# EAGLE board XBee-Explorer-GiantPanel-v21 (EAGLE 6.5.0), part 1 of 7
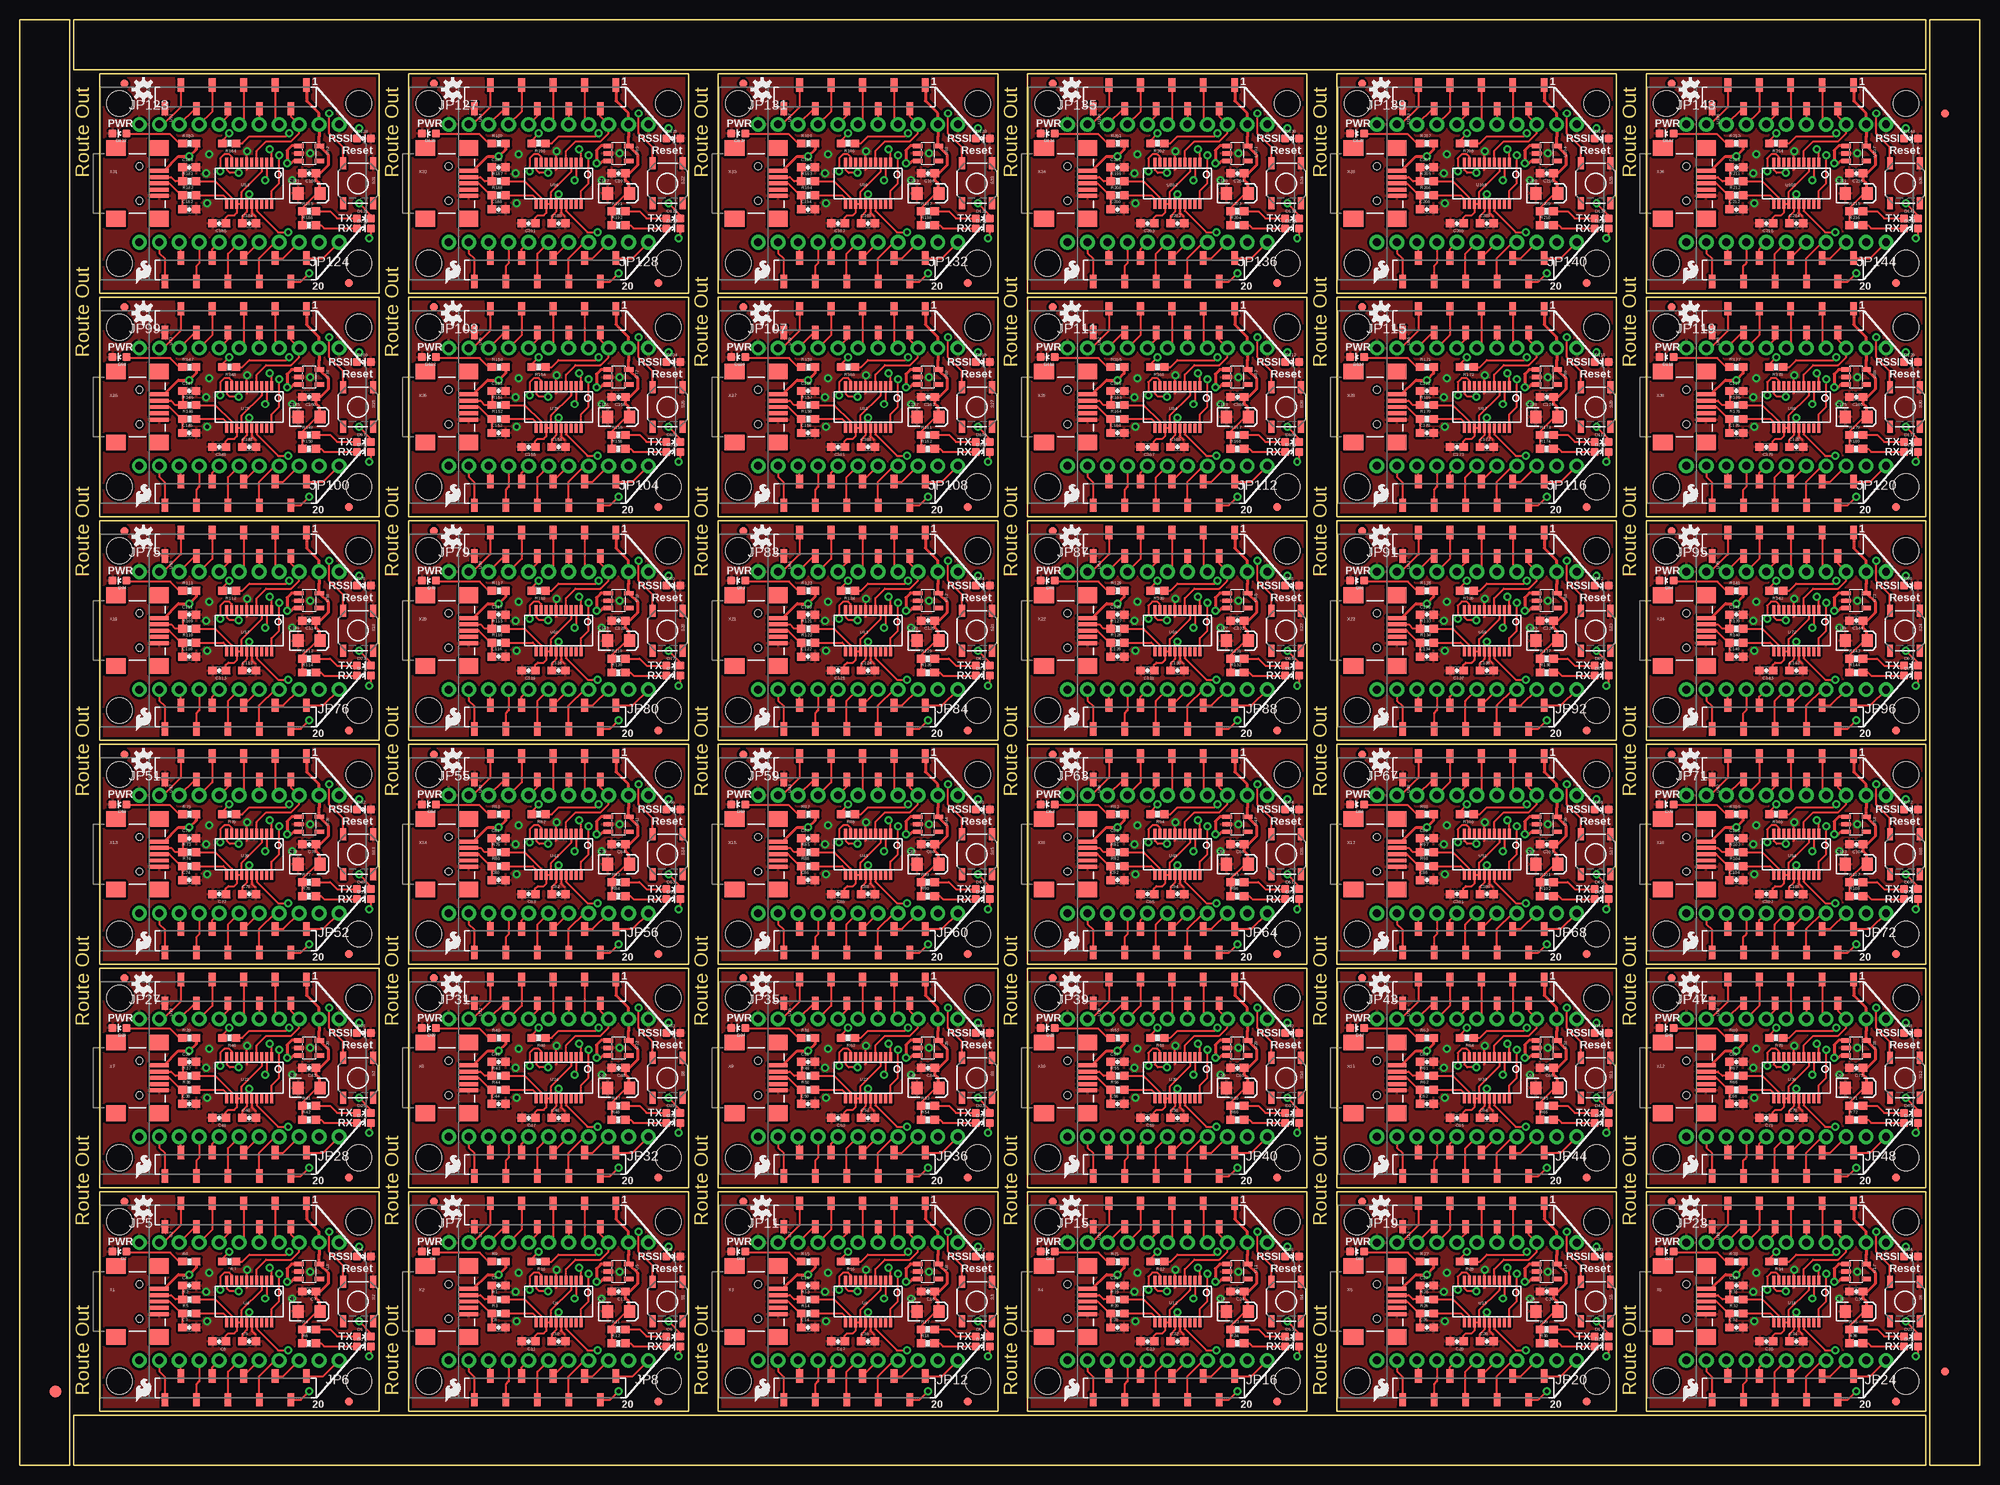
[diagram p0: board, top side]
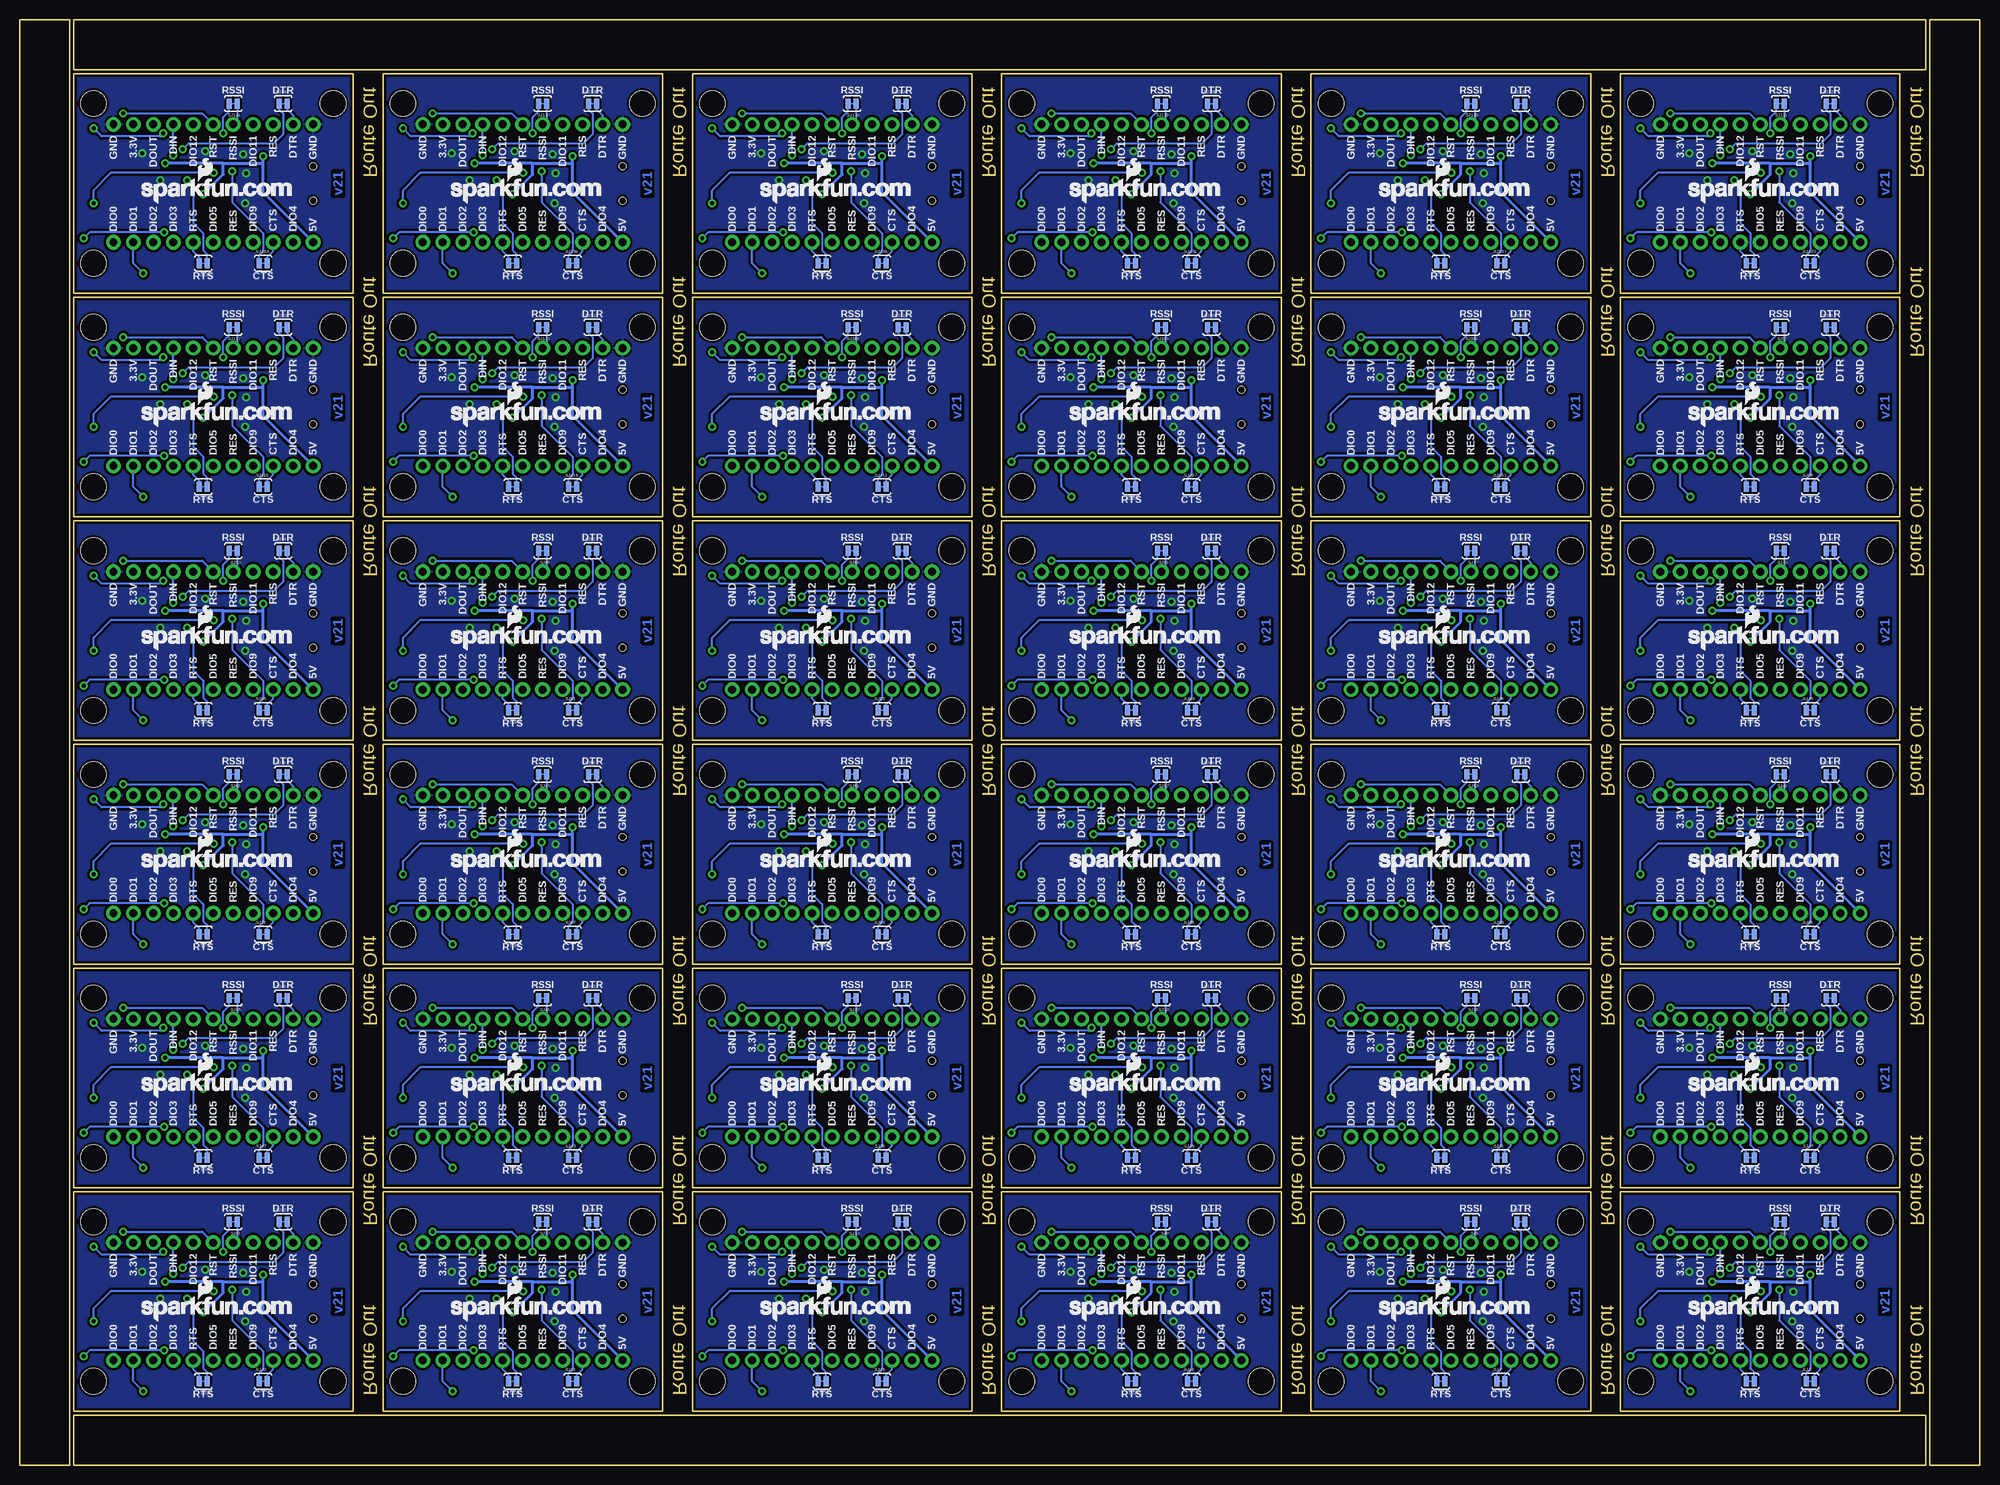
[diagram p1: board, bottom side, seen from below]

Size 249.43 x 183.9 mm. Coordinates in mm from the lower left corner, seen from the top.
Outline: 45.72,6.86 45.72,34.8 10.16,34.8 10.16,6.86 45.72,6.86
Outline: 85.09,6.86 85.09,34.8 49.53,34.8 49.53,6.86 85.09,6.86
Outline: 124.46,6.86 124.46,34.8 88.9,34.8 88.9,6.86 124.46,6.86
Outline: 163.83,6.86 163.83,34.8 128.27,34.8 128.27,6.86 163.83,6.86
Outline: 203.2,6.86 203.2,34.8 167.64,34.8 167.64,6.86 203.2,6.86
Outline: 242.57,6.86 242.57,34.8 207.01,34.8 207.01,6.86 242.57,6.86
Outline: 45.72,35.31 45.72,63.25 10.16,63.25 10.16,35.31 45.72,35.31
Outline: 85.09,35.31 85.09,63.25 49.53,63.25 49.53,35.31 85.09,35.31
Outline: 124.46,35.31 124.46,63.25 88.9,63.25 88.9,35.31 124.46,35.31
Outline: 163.83,35.31 163.83,63.25 128.27,63.25 128.27,35.31 163.83,35.31
Outline: 203.2,35.31 203.2,63.25 167.64,63.25 167.64,35.31 203.2,35.31
Outline: 242.57,35.31 242.57,63.25 207.01,63.25 207.01,35.31 242.57,35.31
Outline: 45.72,63.75 45.72,91.69 10.16,91.69 10.16,63.75 45.72,63.75
Outline: 85.09,63.75 85.09,91.69 49.53,91.69 49.53,63.75 85.09,63.75
Outline: 124.46,63.75 124.46,91.69 88.9,91.69 88.9,63.75 124.46,63.75
Outline: 163.83,63.75 163.83,91.69 128.27,91.69 128.27,63.75 163.83,63.75
Outline: 203.2,63.75 203.2,91.69 167.64,91.69 167.64,63.75 203.2,63.75
Outline: 242.57,63.75 242.57,91.69 207.01,91.69 207.01,63.75 242.57,63.75
Outline: 45.72,92.2 45.72,120.14 10.16,120.14 10.16,92.2 45.72,92.2
Outline: 85.09,92.2 85.09,120.14 49.53,120.14 49.53,92.2 85.09,92.2
Outline: 124.46,92.2 124.46,120.14 88.9,120.14 88.9,92.2 124.46,92.2
Outline: 163.83,92.2 163.83,120.14 128.27,120.14 128.27,92.2 163.83,92.2
Outline: 203.2,92.2 203.2,120.14 167.64,120.14 167.64,92.2 203.2,92.2
Outline: 242.57,92.2 242.57,120.14 207.01,120.14 207.01,92.2 242.57,92.2
Outline: 45.72,120.65 45.72,148.59 10.16,148.59 10.16,120.65 45.72,120.65
Outline: 85.09,120.65 85.09,148.59 49.53,148.59 49.53,120.65 85.09,120.65
Outline: 124.46,120.65 124.46,148.59 88.9,148.59 88.9,120.65 124.46,120.65
Outline: 163.83,120.65 163.83,148.59 128.27,148.59 128.27,120.65 163.83,120.65
Outline: 203.2,120.65 203.2,148.59 167.64,148.59 167.64,120.65 203.2,120.65
Outline: 242.57,120.65 242.57,148.59 207.01,148.59 207.01,120.65 242.57,120.65
Outline: 45.72,149.1 45.72,177.04 10.16,177.04 10.16,149.1 45.72,149.1
Outline: 85.09,149.1 85.09,177.04 49.53,177.04 49.53,149.1 85.09,149.1
Outline: 124.46,149.1 124.46,177.04 88.9,177.04 88.9,149.1 124.46,149.1
Outline: 163.83,149.1 163.83,177.04 128.27,177.04 128.27,149.1 163.83,149.1
Outline: 203.2,149.1 203.2,177.04 167.64,177.04 167.64,149.1 203.2,149.1
Outline: 242.57,149.1 242.57,177.04 207.01,177.04 207.01,149.1 242.57,149.1
Outline: 6.35,0 6.35,183.9 0,183.9 0,0 6.35,0
Outline: 6.86,6.35 6.86,0 242.57,0 242.57,6.35 6.86,6.35
Outline: 243.08,0 249.43,0 249.43,183.9 243.08,183.9 243.08,0
Outline: 242.57,177.55 242.57,183.9 6.86,183.9 6.86,177.55 242.57,177.55
Copper layers (1*16): Top 0.035mm / dielectric 1.5mm / Bottom 0.035mm
Design rules "SparkFun-2-layer": minimum track width 7mil, minimum drill 15mil, track to track 8mil, track to pad 8mil, pad to pad 8mil, via to via 8mil, smd to smd 8mil, copper to edge 8mil, drill to drill 8mil, minimum pad ring 12mil, minimum via ring 10mil, stop-mask expansion 4mil, vias tented up to drill 20mil, thermal gap 10mil
Net classes: 0 default: width 0.203 mm; 1 vcc: width 0.305 mm; 2 gnd: width 0.254 mm

## Footprints (pad centres in the part's own frame; a part is rotated, then mirrored left to right if it is on the bottom)
EIA3216 = smd 1.4 x 1.6: A 1.4,0; C -1.4,0
0603-CAP = smd 1.1 x 1: 1 -0.85,0; 2 0.85,0
LED-0603 = smd 1 x 1: A 0,-0.877; C 0,0.877
FIDUCIAL-1.5X3 = smd 1.5 x 1.5: 1 0,0
FIDUCIAL-1X2 = smd 1 x 1: 1 0,0
1X11_NO_SILK = drill 1.016 pad 1.88: 1 0,0; 2 2.54,0; 3 5.08,0; 4 7.62,0; 5 10.16,0; 6 12.7,0; 7 15.24,0; 8 17.78,0; 9 20.32,0; 10 22.86,0; 11 25.4,0
0603-RES = smd 1.1 x 1: 1 -0.85,0; 2 0.85,0
TACTILE_SWITCH_SMD = smd 1.524 x 0.762: 1 -2.54,1.905; 2 2.54,1.905; 3 -2.54,-1.905; 4 2.54,-1.905
SJ_2S-TRACE = smd 0.635 x 1.27: 1 -0.508,0; 2 0.508,0
XBEE-SMD = smd 1.7 x 0.85: 1 -12.5,20; 2 -9.5,18; 3 -12.5,16; 4 -9.5,14; 5 -12.5,12; 6 -9.5,10; 7 -12.5,8; 8 -9.5,6; 9 -12.5,4; 10 -9.5,2; 11 12.5,2; 12 9.5,4; 13 12.5,6; 14 9.5,8; 15 12.5,10; 16 9.5,12; 17 12.5,14; 18 9.5,16; 19 12.5,18; 20 9.5,20
SOT23-5 = smd 0.55 x 1.2: 1 -0.95,-1.3; 2 0,-1.3; 3 0.95,-1.3; 4 0.95,1.3; 5 -0.95,1.3
SSOP20_L = smd 0.381 x 1.143: 1 -2.857,-2.68; 2 -2.223,-2.68; 3 -1.587,-2.68; 4 -0.953,-2.68; 5 -0.318,-2.68; 6 0.318,-2.68; 7 0.953,-2.68; 8 1.587,-2.68; 9 2.223,-2.68; 10 2.857,-2.68; 11 2.857,2.68; 12 2.223,2.68; 13 1.587,2.68; 14 0.953,2.68; 15 0.318,2.68; 16 -0.318,2.68; 17 -0.953,2.68; 18 -1.587,2.68; 19 -2.223,2.68; 20 -2.857,2.68
STAND-OFF = hole 3.302: 0,0
USB-MINIB = smd 2.5 x 0.5: D+ 2.5,0; D- 2.5,0.8; GND 2.5,-1.6; ID 2.5,-0.8; VBUS 2.5,1.6 | smd 2.5 x 2: GND@1 -3,-4.5; GND@2 -3,4.5; GND@3 2.5,4.5; GND@4 2.5,-4.5 | hole 0.9: 0,2.2; 0,-2.2

## Placement (x,y rotation side)
C1  10uF  [EIA3216]  36.83,19.56 0 top
C2  10uF  [EIA3216]  76.2,19.56 0 top
C3  47pF  [0603-CAP]  21.59,17.53 0 top
C4  47pF  [0603-CAP]  21.59,22.86 0 top
C5  0.1uF  [0603-CAP]  29.21,15.75 0 top
C6  0.1uF  [0603-CAP]  25.4,15.75 180 top
C7  0.1uF  [0603-CAP]  36.83,22.1 180 top
C8  47pF  [0603-CAP]  60.96,17.53 0 top
C9  47pF  [0603-CAP]  60.96,22.86 0 top
C10  0.1uF  [0603-CAP]  68.58,15.75 0 top
C11  0.1uF  [0603-CAP]  64.77,15.75 180 top
C12  0.1uF  [0603-CAP]  76.2,22.1 180 top
C13  10uF  [EIA3216]  115.57,19.56 0 top
C14  47pF  [0603-CAP]  100.33,17.53 0 top
C15  47pF  [0603-CAP]  100.33,22.86 0 top
C16  0.1uF  [0603-CAP]  107.95,15.75 0 top
C17  0.1uF  [0603-CAP]  104.14,15.75 180 top
C18  0.1uF  [0603-CAP]  115.57,22.1 180 top
C19  10uF  [EIA3216]  154.94,19.56 0 top
C20  47pF  [0603-CAP]  139.7,17.53 0 top
C21  47pF  [0603-CAP]  139.7,22.86 0 top
C22  0.1uF  [0603-CAP]  147.32,15.75 0 top
C23  0.1uF  [0603-CAP]  143.51,15.75 180 top
C24  0.1uF  [0603-CAP]  154.94,22.1 180 top
C25  10uF  [EIA3216]  194.31,19.56 0 top
C26  47pF  [0603-CAP]  179.07,17.53 0 top
C27  47pF  [0603-CAP]  179.07,22.86 0 top
C28  0.1uF  [0603-CAP]  186.69,15.75 0 top
C29  0.1uF  [0603-CAP]  182.88,15.75 180 top
C30  0.1uF  [0603-CAP]  194.31,22.1 180 top
C31  10uF  [EIA3216]  233.68,19.56 0 top
C32  47pF  [0603-CAP]  218.44,17.53 0 top
C33  47pF  [0603-CAP]  218.44,22.86 0 top
C34  0.1uF  [0603-CAP]  226.06,15.75 0 top
C35  0.1uF  [0603-CAP]  222.25,15.75 180 top
C36  0.1uF  [0603-CAP]  233.68,22.1 180 top
C37  10uF  [EIA3216]  36.83,48.01 0 top
C38  47pF  [0603-CAP]  21.59,45.97 0 top
C39  47pF  [0603-CAP]  21.59,51.31 0 top
C40  0.1uF  [0603-CAP]  29.21,44.2 0 top
C41  0.1uF  [0603-CAP]  25.4,44.2 180 top
C42  0.1uF  [0603-CAP]  36.83,50.55 180 top
C43  10uF  [EIA3216]  76.2,48.01 0 top
C44  47pF  [0603-CAP]  60.96,45.97 0 top
C45  47pF  [0603-CAP]  60.96,51.31 0 top
C46  0.1uF  [0603-CAP]  68.58,44.2 0 top
C47  0.1uF  [0603-CAP]  64.77,44.2 180 top
C48  0.1uF  [0603-CAP]  76.2,50.55 180 top
C49  10uF  [EIA3216]  115.57,48.01 0 top
C50  47pF  [0603-CAP]  100.33,45.97 0 top
C51  47pF  [0603-CAP]  100.33,51.31 0 top
C52  0.1uF  [0603-CAP]  107.95,44.2 0 top
C53  0.1uF  [0603-CAP]  104.14,44.2 180 top
C54  0.1uF  [0603-CAP]  115.57,50.55 180 top
C55  10uF  [EIA3216]  154.94,48.01 0 top
C56  47pF  [0603-CAP]  139.7,45.97 0 top
C57  47pF  [0603-CAP]  139.7,51.31 0 top
C58  0.1uF  [0603-CAP]  147.32,44.2 0 top
C59  0.1uF  [0603-CAP]  143.51,44.2 180 top
C60  0.1uF  [0603-CAP]  154.94,50.55 180 top
C61  10uF  [EIA3216]  194.31,48.01 0 top
C62  47pF  [0603-CAP]  179.07,45.97 0 top
C63  47pF  [0603-CAP]  179.07,51.31 0 top
C64  0.1uF  [0603-CAP]  186.69,44.2 0 top
C65  0.1uF  [0603-CAP]  182.88,44.2 180 top
C66  0.1uF  [0603-CAP]  194.31,50.55 180 top
C67  10uF  [EIA3216]  233.68,48.01 0 top
C68  47pF  [0603-CAP]  218.44,45.97 0 top
C69  47pF  [0603-CAP]  218.44,51.31 0 top
C70  0.1uF  [0603-CAP]  226.06,44.2 0 top
C71  0.1uF  [0603-CAP]  222.25,44.2 180 top
C72  0.1uF  [0603-CAP]  233.68,50.55 180 top
C73  10uF  [EIA3216]  36.83,76.45 0 top
C74  47pF  [0603-CAP]  21.59,74.42 0 top
C75  47pF  [0603-CAP]  21.59,79.76 0 top
C76  0.1uF  [0603-CAP]  29.21,72.64 0 top
C77  0.1uF  [0603-CAP]  25.4,72.64 180 top
C78  0.1uF  [0603-CAP]  36.83,78.99 180 top
C79  10uF  [EIA3216]  76.2,76.45 0 top
C80  47pF  [0603-CAP]  60.96,74.42 0 top
C81  47pF  [0603-CAP]  60.96,79.76 0 top
C82  0.1uF  [0603-CAP]  68.58,72.64 0 top
C83  0.1uF  [0603-CAP]  64.77,72.64 180 top
C84  0.1uF  [0603-CAP]  76.2,78.99 180 top
C85  10uF  [EIA3216]  115.57,76.45 0 top
C86  47pF  [0603-CAP]  100.33,74.42 0 top
C87  47pF  [0603-CAP]  100.33,79.76 0 top
C88  0.1uF  [0603-CAP]  107.95,72.64 0 top
C89  0.1uF  [0603-CAP]  104.14,72.64 180 top
C90  0.1uF  [0603-CAP]  115.57,78.99 180 top
C91  10uF  [EIA3216]  154.94,76.45 0 top
C92  47pF  [0603-CAP]  139.7,74.42 0 top
C93  47pF  [0603-CAP]  139.7,79.76 0 top
C94  0.1uF  [0603-CAP]  147.32,72.64 0 top
C95  0.1uF  [0603-CAP]  143.51,72.64 180 top
C96  0.1uF  [0603-CAP]  154.94,78.99 180 top
C97  10uF  [EIA3216]  194.31,76.45 0 top
C98  47pF  [0603-CAP]  179.07,74.42 0 top
C99  47pF  [0603-CAP]  179.07,79.76 0 top
C100  0.1uF  [0603-CAP]  186.69,72.64 0 top
C101  0.1uF  [0603-CAP]  182.88,72.64 180 top
C102  0.1uF  [0603-CAP]  194.31,78.99 180 top
C103  10uF  [EIA3216]  233.68,76.45 0 top
C104  47pF  [0603-CAP]  218.44,74.42 0 top
C105  47pF  [0603-CAP]  218.44,79.76 0 top
C106  0.1uF  [0603-CAP]  226.06,72.64 0 top
C107  0.1uF  [0603-CAP]  222.25,72.64 180 top
C108  0.1uF  [0603-CAP]  233.68,78.99 180 top
C109  10uF  [EIA3216]  36.83,104.9 0 top
C110  47pF  [0603-CAP]  21.59,102.87 0 top
C111  47pF  [0603-CAP]  21.59,108.2 0 top
C112  0.1uF  [0603-CAP]  29.21,101.09 0 top
C113  0.1uF  [0603-CAP]  25.4,101.09 180 top
C114  0.1uF  [0603-CAP]  36.83,107.44 180 top
C115  10uF  [EIA3216]  76.2,104.9 0 top
C116  47pF  [0603-CAP]  60.96,102.87 0 top
C117  47pF  [0603-CAP]  60.96,108.2 0 top
C118  0.1uF  [0603-CAP]  68.58,101.09 0 top
C119  0.1uF  [0603-CAP]  64.77,101.09 180 top
C120  0.1uF  [0603-CAP]  76.2,107.44 180 top
C121  10uF  [EIA3216]  115.57,104.9 0 top
C122  47pF  [0603-CAP]  100.33,102.87 0 top
C123  47pF  [0603-CAP]  100.33,108.2 0 top
C124  0.1uF  [0603-CAP]  107.95,101.09 0 top
C125  0.1uF  [0603-CAP]  104.14,101.09 180 top
C126  0.1uF  [0603-CAP]  115.57,107.44 180 top
C127  10uF  [EIA3216]  154.94,104.9 0 top
C128  47pF  [0603-CAP]  139.7,102.87 0 top
C129  47pF  [0603-CAP]  139.7,108.2 0 top
C130  0.1uF  [0603-CAP]  147.32,101.09 0 top
C131  0.1uF  [0603-CAP]  143.51,101.09 180 top
C132  0.1uF  [0603-CAP]  154.94,107.44 180 top
C133  10uF  [EIA3216]  194.31,104.9 0 top
C134  47pF  [0603-CAP]  179.07,102.87 0 top
C135  47pF  [0603-CAP]  179.07,108.2 0 top
C136  0.1uF  [0603-CAP]  186.69,101.09 0 top
C137  0.1uF  [0603-CAP]  182.88,101.09 180 top
C138  0.1uF  [0603-CAP]  194.31,107.44 180 top
C139  10uF  [EIA3216]  233.68,104.9 0 top
C140  47pF  [0603-CAP]  218.44,102.87 0 top
C141  47pF  [0603-CAP]  218.44,108.2 0 top
C142  0.1uF  [0603-CAP]  226.06,101.09 0 top
C143  0.1uF  [0603-CAP]  222.25,101.09 180 top
C144  0.1uF  [0603-CAP]  233.68,107.44 180 top
C145  10uF  [EIA3216]  36.83,133.35 0 top
C146  47pF  [0603-CAP]  21.59,131.32 0 top
C147  47pF  [0603-CAP]  21.59,136.65 0 top
C148  0.1uF  [0603-CAP]  29.21,129.54 0 top
C149  0.1uF  [0603-CAP]  25.4,129.54 180 top
C150  0.1uF  [0603-CAP]  36.83,135.89 180 top
C151  10uF  [EIA3216]  76.2,133.35 0 top
C152  47pF  [0603-CAP]  60.96,131.32 0 top
C153  47pF  [0603-CAP]  60.96,136.65 0 top
C154  0.1uF  [0603-CAP]  68.58,129.54 0 top
C155  0.1uF  [0603-CAP]  64.77,129.54 180 top
C156  0.1uF  [0603-CAP]  76.2,135.89 180 top
C157  10uF  [EIA3216]  115.57,133.35 0 top
C158  47pF  [0603-CAP]  100.33,131.32 0 top
C159  47pF  [0603-CAP]  100.33,136.65 0 top
C160  0.1uF  [0603-CAP]  107.95,129.54 0 top
C161  0.1uF  [0603-CAP]  104.14,129.54 180 top
C162  0.1uF  [0603-CAP]  115.57,135.89 180 top
C163  10uF  [EIA3216]  154.94,133.35 0 top
C164  47pF  [0603-CAP]  139.7,131.32 0 top
C165  47pF  [0603-CAP]  139.7,136.65 0 top
C166  0.1uF  [0603-CAP]  147.32,129.54 0 top
C167  0.1uF  [0603-CAP]  143.51,129.54 180 top
C168  0.1uF  [0603-CAP]  154.94,135.89 180 top
C169  10uF  [EIA3216]  194.31,133.35 0 top
C170  47pF  [0603-CAP]  179.07,131.32 0 top
C171  47pF  [0603-CAP]  179.07,136.65 0 top
C172  0.1uF  [0603-CAP]  186.69,129.54 0 top
C173  0.1uF  [0603-CAP]  182.88,129.54 180 top
C174  0.1uF  [0603-CAP]  194.31,135.89 180 top
C175  10uF  [EIA3216]  233.68,133.35 0 top
C176  47pF  [0603-CAP]  218.44,131.32 0 top
C177  47pF  [0603-CAP]  218.44,136.65 0 top
C178  0.1uF  [0603-CAP]  226.06,129.54 0 top
C179  0.1uF  [0603-CAP]  222.25,129.54 180 top
C180  0.1uF  [0603-CAP]  233.68,135.89 180 top
C181  10uF  [EIA3216]  36.83,161.8 0 top
C182  47pF  [0603-CAP]  21.59,159.77 0 top
C183  47pF  [0603-CAP]  21.59,165.1 0 top
C184  0.1uF  [0603-CAP]  29.21,157.99 0 top
C185  0.1uF  [0603-CAP]  25.4,157.99 180 top
C186  0.1uF  [0603-CAP]  36.83,164.34 180 top
C187  10uF  [EIA3216]  76.2,161.8 0 top
C188  47pF  [0603-CAP]  60.96,159.77 0 top
C189  47pF  [0603-CAP]  60.96,165.1 0 top
C190  0.1uF  [0603-CAP]  68.58,157.99 0 top
C191  0.1uF  [0603-CAP]  64.77,157.99 180 top
C192  0.1uF  [0603-CAP]  76.2,164.34 180 top
C193  10uF  [EIA3216]  115.57,161.8 0 top
C194  47pF  [0603-CAP]  100.33,159.77 0 top
C195  47pF  [0603-CAP]  100.33,165.1 0 top
C196  0.1uF  [0603-CAP]  107.95,157.99 0 top
C197  0.1uF  [0603-CAP]  104.14,157.99 180 top
C198  0.1uF  [0603-CAP]  115.57,164.34 180 top
C199  10uF  [EIA3216]  154.94,161.8 0 top
C200  47pF  [0603-CAP]  139.7,159.77 0 top
C201  47pF  [0603-CAP]  139.7,165.1 0 top
C202  0.1uF  [0603-CAP]  147.32,157.99 0 top
C203  0.1uF  [0603-CAP]  143.51,157.99 180 top
C204  0.1uF  [0603-CAP]  154.94,164.34 180 top
C205  10uF  [EIA3216]  194.31,161.8 0 top
C206  47pF  [0603-CAP]  179.07,159.77 0 top
C207  47pF  [0603-CAP]  179.07,165.1 0 top
C208  0.1uF  [0603-CAP]  186.69,157.99 0 top
C209  0.1uF  [0603-CAP]  182.88,157.99 180 top
C210  0.1uF  [0603-CAP]  194.31,164.34 180 top
C211  10uF  [EIA3216]  233.68,161.8 0 top
C212  47pF  [0603-CAP]  218.44,159.77 0 top
C213  47pF  [0603-CAP]  218.44,165.1 0 top
C214  0.1uF  [0603-CAP]  226.06,157.99 0 top
C215  0.1uF  [0603-CAP]  222.25,157.99 180 top
C216  0.1uF  [0603-CAP]  233.68,164.34 180 top
D1  RED  [LED-0603]  43.81,16.38 270 top
D2  RED  [LED-0603]  12.7,27.18 90 top
D3  GREEN  [LED-0603]  43.81,15.11 270 top
D4  GREEN  [LED-0603]  43.81,26.54 270 top
D5  RED  [LED-0603]  83.19,16.38 270 top
D6  RED  [LED-0603]  52.07,27.18 90 top
D7  GREEN  [LED-0603]  83.19,15.11 270 top
D8  GREEN  [LED-0603]  83.19,26.54 270 top
D9  RED  [LED-0603]  122.56,16.38 270 top
D10  RED  [LED-0603]  91.44,27.18 90 top
D11  GREEN  [LED-0603]  122.56,15.11 270 top
D12  GREEN  [LED-0603]  122.56,26.54 270 top
D13  RED  [LED-0603]  161.93,16.38 270 top
D14  RED  [LED-0603]  130.81,27.18 90 top
D15  GREEN  [LED-0603]  161.93,15.11 270 top
D16  GREEN  [LED-0603]  161.93,26.54 270 top
D17  RED  [LED-0603]  201.29,16.38 270 top
D18  RED  [LED-0603]  170.18,27.18 90 top
D19  GREEN  [LED-0603]  201.29,15.11 270 top
D20  GREEN  [LED-0603]  201.29,26.54 270 top
D21  RED  [LED-0603]  240.66,16.38 270 top
D22  RED  [LED-0603]  209.55,27.18 90 top
D23  GREEN  [LED-0603]  240.66,15.11 270 top
D24  GREEN  [LED-0603]  240.66,26.54 270 top
D25  RED  [LED-0603]  43.81,44.83 270 top
D26  RED  [LED-0603]  12.7,55.63 90 top
D27  GREEN  [LED-0603]  43.81,43.56 270 top
D28  GREEN  [LED-0603]  43.81,54.99 270 top
D29  RED  [LED-0603]  83.19,44.83 270 top
D30  RED  [LED-0603]  52.07,55.63 90 top
D31  GREEN  [LED-0603]  83.19,43.56 270 top
D32  GREEN  [LED-0603]  83.19,54.99 270 top
D33  RED  [LED-0603]  122.56,44.83 270 top
D34  RED  [LED-0603]  91.44,55.63 90 top
D35  GREEN  [LED-0603]  122.56,43.56 270 top
D36  GREEN  [LED-0603]  122.56,54.99 270 top
D37  RED  [LED-0603]  161.93,44.83 270 top
D38  RED  [LED-0603]  130.81,55.63 90 top
D39  GREEN  [LED-0603]  161.93,43.56 270 top
D40  GREEN  [LED-0603]  161.93,54.99 270 top
D41  RED  [LED-0603]  201.29,44.83 270 top
D42  RED  [LED-0603]  170.18,55.63 90 top
D43  GREEN  [LED-0603]  201.29,43.56 270 top
D44  GREEN  [LED-0603]  201.29,54.99 270 top
D45  RED  [LED-0603]  240.66,44.83 270 top
D46  RED  [LED-0603]  209.55,55.63 90 top
D47  GREEN  [LED-0603]  240.66,43.56 270 top
D48  GREEN  [LED-0603]  240.66,54.99 270 top
D49  RED  [LED-0603]  43.81,73.28 270 top
D50  RED  [LED-0603]  12.7,84.07 90 top
D51  GREEN  [LED-0603]  43.81,72.01 270 top
D52  GREEN  [LED-0603]  43.81,83.44 270 top
D53  RED  [LED-0603]  83.19,73.28 270 top
D54  RED  [LED-0603]  52.07,84.07 90 top
D55  GREEN  [LED-0603]  83.19,72.01 270 top
D56  GREEN  [LED-0603]  83.19,83.44 270 top
D57  RED  [LED-0603]  122.56,73.28 270 top
D58  RED  [LED-0603]  91.44,84.07 90 top
D59  GREEN  [LED-0603]  122.56,72.01 270 top
D60  GREEN  [LED-0603]  122.56,83.44 270 top
D61  RED  [LED-0603]  161.93,73.28 270 top
D62  RED  [LED-0603]  130.81,84.07 90 top
D63  GREEN  [LED-0603]  161.93,72.01 270 top
D64  GREEN  [LED-0603]  161.93,83.44 270 top
D65  RED  [LED-0603]  201.29,73.28 270 top
D66  RED  [LED-0603]  170.18,84.07 90 top
D67  GREEN  [LED-0603]  201.29,72.01 270 top
D68  GREEN  [LED-0603]  201.29,83.44 270 top
D69  RED  [LED-0603]  240.66,73.28 270 top
D70  RED  [LED-0603]  209.55,84.07 90 top
D71  GREEN  [LED-0603]  240.66,72.01 270 top
D72  GREEN  [LED-0603]  240.66,83.44 270 top
D73  RED  [LED-0603]  43.81,101.73 270 top
D74  RED  [LED-0603]  12.7,112.52 90 top
D75  GREEN  [LED-0603]  43.81,100.46 270 top
D76  GREEN  [LED-0603]  43.81,111.89 270 top
D77  RED  [LED-0603]  83.19,101.73 270 top
D78  RED  [LED-0603]  52.07,112.52 90 top
D79  GREEN  [LED-0603]  83.19,100.46 270 top
D80  GREEN  [LED-0603]  83.19,111.89 270 top
D81  RED  [LED-0603]  122.56,101.73 270 top
D82  RED  [LED-0603]  91.44,112.52 90 top
D83  GREEN  [LED-0603]  122.56,100.46 270 top
D84  GREEN  [LED-0603]  122.56,111.89 270 top
D85  RED  [LED-0603]  161.93,101.73 270 top
D86  RED  [LED-0603]  130.81,112.52 90 top
D87  GREEN  [LED-0603]  161.93,100.46 270 top
D88  GREEN  [LED-0603]  161.93,111.89 270 top
D89  RED  [LED-0603]  201.29,101.73 270 top
D90  RED  [LED-0603]  170.18,112.52 90 top
D91  GREEN  [LED-0603]  201.29,100.46 270 top
D92  GREEN  [LED-0603]  201.29,111.89 270 top
D93  RED  [LED-0603]  240.66,101.73 270 top
D94  RED  [LED-0603]  209.55,112.52 90 top
D95  GREEN  [LED-0603]  240.66,100.46 270 top
D96  GREEN  [LED-0603]  240.66,111.89 270 top
D97  RED  [LED-0603]  43.81,130.18 270 top
D98  RED  [LED-0603]  12.7,140.97 90 top
D99  GREEN  [LED-0603]  43.81,128.91 270 top
D100  GREEN  [LED-0603]  43.81,140.34 270 top
D101  RED  [LED-0603]  83.19,130.18 270 top
D102  RED  [LED-0603]  52.07,140.97 90 top
D103  GREEN  [LED-0603]  83.19,128.91 270 top
D104  GREEN  [LED-0603]  83.19,140.34 270 top
D105  RED  [LED-0603]  122.56,130.18 270 top
D106  RED  [LED-0603]  91.44,140.97 90 top
D107  GREEN  [LED-0603]  122.56,128.91 270 top
D108  GREEN  [LED-0603]  122.56,140.34 270 top
D109  RED  [LED-0603]  161.93,130.18 270 top
D110  RED  [LED-0603]  130.81,140.97 90 top
D111  GREEN  [LED-0603]  161.93,128.91 270 top
D112  GREEN  [LED-0603]  161.93,140.34 270 top
D113  RED  [LED-0603]  201.29,130.18 270 top
D114  RED  [LED-0603]  170.18,140.97 90 top
D115  GREEN  [LED-0603]  201.29,128.91 270 top
D116  GREEN  [LED-0603]  201.29,140.34 270 top
D117  RED  [LED-0603]  240.66,130.18 270 top
D118  RED  [LED-0603]  209.55,140.97 90 top
D119  GREEN  [LED-0603]  240.66,128.91 270 top
D120  GREEN  [LED-0603]  240.66,140.34 270 top
D121  RED  [LED-0603]  43.81,158.62 270 top
D122  RED  [LED-0603]  12.7,169.42 90 top
D123  GREEN  [LED-0603]  43.81,157.35 270 top
D124  GREEN  [LED-0603]  43.81,168.78 270 top
D125  RED  [LED-0603]  83.19,158.62 270 top
D126  RED  [LED-0603]  52.07,169.42 90 top
D127  GREEN  [LED-0603]  83.19,157.35 270 top
D128  GREEN  [LED-0603]  83.19,168.78 270 top
D129  RED  [LED-0603]  122.56,158.62 270 top
D130  RED  [LED-0603]  91.44,169.42 90 top
D131  GREEN  [LED-0603]  122.56,157.35 270 top
D132  GREEN  [LED-0603]  122.56,168.78 270 top
D133  RED  [LED-0603]  161.93,158.62 270 top
D134  RED  [LED-0603]  130.81,169.42 90 top
D135  GREEN  [LED-0603]  161.93,157.35 270 top
D136  GREEN  [LED-0603]  161.93,168.78 270 top
D137  RED  [LED-0603]  201.29,158.62 270 top
D138  RED  [LED-0603]  170.18,169.42 90 top
D139  GREEN  [LED-0603]  201.29,157.35 270 top
D140  GREEN  [LED-0603]  201.29,168.78 270 top
D141  RED  [LED-0603]  240.66,158.62 270 top
D142  RED  [LED-0603]  209.55,169.42 90 top
D143  GREEN  [LED-0603]  240.66,157.35 270 top
D144  GREEN  [LED-0603]  240.66,168.78 270 top
E$1  [FIDUCIAL-1.5X3]  4.57,9.4 0 top
E$5  [FIDUCIAL-1X2]  244.98,11.94 0 top
E$7  [FIDUCIAL-1X2]  244.98,171.96 180 top
JP1  FIDUCIAL1X2  [FIDUCIAL-1X2]  41.91,8.13 0 top
JP2  FIDUCIAL1X2  [FIDUCIAL-1X2]  81.28,8.13 0 top
JP3  FIDUCIAL1X2  [FIDUCIAL-1X2]  52.7,33.53 0 top
JP4  FIDUCIAL1X2  [FIDUCIAL-1X2]  13.34,33.53 0 top
JP5  M111X11_NO_SILK  [1X11_NO_SILK]  15.24,28.32 0 top
JP6  M111X11_NO_SILK  [1X11_NO_SILK]  40.64,13.34 180 top
JP7  M111X11_NO_SILK  [1X11_NO_SILK]  54.61,28.32 0 top
JP8  M111X11_NO_SILK  [1X11_NO_SILK]  80.01,13.34 180 top
JP9  FIDUCIAL1X2  [FIDUCIAL-1X2]  120.65,8.13 0 top
JP10  FIDUCIAL1X2  [FIDUCIAL-1X2]  92.08,33.53 0 top
JP11  M111X11_NO_SILK  [1X11_NO_SILK]  93.98,28.32 0 top
JP12  M111X11_NO_SILK  [1X11_NO_SILK]  119.38,13.34 180 top
JP13  FIDUCIAL1X2  [FIDUCIAL-1X2]  160.02,8.13 0 top
JP14  FIDUCIAL1X2  [FIDUCIAL-1X2]  131.44,33.53 0 top
JP15  M111X11_NO_SILK  [1X11_NO_SILK]  133.35,28.32 0 top
JP16  M111X11_NO_SILK  [1X11_NO_SILK]  158.75,13.34 180 top
JP17  FIDUCIAL1X2  [FIDUCIAL-1X2]  199.39,8.13 0 top
JP18  FIDUCIAL1X2  [FIDUCIAL-1X2]  170.81,33.53 0 top
JP19  M111X11_NO_SILK  [1X11_NO_SILK]  172.72,28.32 0 top
JP20  M111X11_NO_SILK  [1X11_NO_SILK]  198.12,13.34 180 top
JP21  FIDUCIAL1X2  [FIDUCIAL-1X2]  238.76,8.13 0 top
JP22  FIDUCIAL1X2  [FIDUCIAL-1X2]  210.19,33.53 0 top
JP23  M111X11_NO_SILK  [1X11_NO_SILK]  212.09,28.32 0 top
JP24  M111X11_NO_SILK  [1X11_NO_SILK]  237.49,13.34 180 top
JP25  FIDUCIAL1X2  [FIDUCIAL-1X2]  41.91,36.58 0 top
JP26  FIDUCIAL1X2  [FIDUCIAL-1X2]  13.34,61.98 0 top
JP27  M111X11_NO_SILK  [1X11_NO_SILK]  15.24,56.77 0 top
JP28  M111X11_NO_SILK  [1X11_NO_SILK]  40.64,41.78 180 top
JP29  FIDUCIAL1X2  [FIDUCIAL-1X2]  81.28,36.58 0 top
JP30  FIDUCIAL1X2  [FIDUCIAL-1X2]  52.7,61.98 0 top
JP31  M111X11_NO_SILK  [1X11_NO_SILK]  54.61,56.77 0 top
JP32  M111X11_NO_SILK  [1X11_NO_SILK]  80.01,41.78 180 top
JP33  FIDUCIAL1X2  [FIDUCIAL-1X2]  120.65,36.58 0 top
JP34  FIDUCIAL1X2  [FIDUCIAL-1X2]  92.08,61.98 0 top
JP35  M111X11_NO_SILK  [1X11_NO_SILK]  93.98,56.77 0 top
JP36  M111X11_NO_SILK  [1X11_NO_SILK]  119.38,41.78 180 top
JP37  FIDUCIAL1X2  [FIDUCIAL-1X2]  160.02,36.58 0 top
JP38  FIDUCIAL1X2  [FIDUCIAL-1X2]  131.44,61.98 0 top
JP39  M111X11_NO_SILK  [1X11_NO_SILK]  133.35,56.77 0 top
JP40  M111X11_NO_SILK  [1X11_NO_SILK]  158.75,41.78 180 top
JP41  FIDUCIAL1X2  [FIDUCIAL-1X2]  199.39,36.58 0 top
JP42  FIDUCIAL1X2  [FIDUCIAL-1X2]  170.81,61.98 0 top
JP43  M111X11_NO_SILK  [1X11_NO_SILK]  172.72,56.77 0 top
JP44  M111X11_NO_SILK  [1X11_NO_SILK]  198.12,41.78 180 top
JP45  FIDUCIAL1X2  [FIDUCIAL-1X2]  238.76,36.58 0 top
JP46  FIDUCIAL1X2  [FIDUCIAL-1X2]  210.19,61.98 0 top
JP47  M111X11_NO_SILK  [1X11_NO_SILK]  212.09,56.77 0 top
JP48  M111X11_NO_SILK  [1X11_NO_SILK]  237.49,41.78 180 top
JP49  FIDUCIAL1X2  [FIDUCIAL-1X2]  41.91,65.02 0 top
JP50  FIDUCIAL1X2  [FIDUCIAL-1X2]  13.34,90.42 0 top
JP51  M111X11_NO_SILK  [1X11_NO_SILK]  15.24,85.22 0 top
JP52  M111X11_NO_SILK  [1X11_NO_SILK]  40.64,70.23 180 top
JP53  FIDUCIAL1X2  [FIDUCIAL-1X2]  81.28,65.02 0 top
JP54  FIDUCIAL1X2  [FIDUCIAL-1X2]  52.7,90.42 0 top
JP55  M111X11_NO_SILK  [1X11_NO_SILK]  54.61,85.22 0 top
JP56  M111X11_NO_SILK  [1X11_NO_SILK]  80.01,70.23 180 top
JP57  FIDUCIAL1X2  [FIDUCIAL-1X2]  120.65,65.02 0 top
JP58  FIDUCIAL1X2  [FIDUCIAL-1X2]  92.08,90.42 0 top
JP59  M111X11_NO_SILK  [1X11_NO_SILK]  93.98,85.22 0 top
JP60  M111X11_NO_SILK  [1X11_NO_SILK]  119.38,70.23 180 top
JP61  FIDUCIAL1X2  [FIDUCIAL-1X2]  160.02,65.02 0 top
JP62  FIDUCIAL1X2  [FIDUCIAL-1X2]  131.44,90.42 0 top
JP63  M111X11_NO_SILK  [1X11_NO_SILK]  133.35,85.22 0 top
JP64  M111X11_NO_SILK  [1X11_NO_SILK]  158.75,70.23 180 top
JP65  FIDUCIAL1X2  [FIDUCIAL-1X2]  199.39,65.02 0 top
JP66  FIDUCIAL1X2  [FIDUCIAL-1X2]  170.81,90.42 0 top
JP67  M111X11_NO_SILK  [1X11_NO_SILK]  172.72,85.22 0 top
JP68  M111X11_NO_SILK  [1X11_NO_SILK]  198.12,70.23 180 top
JP69  FIDUCIAL1X2  [FIDUCIAL-1X2]  238.76,65.02 0 top
JP70  FIDUCIAL1X2  [FIDUCIAL-1X2]  210.19,90.42 0 top
JP71  M111X11_NO_SILK  [1X11_NO_SILK]  212.09,85.22 0 top
JP72  M111X11_NO_SILK  [1X11_NO_SILK]  237.49,70.23 180 top
JP73  FIDUCIAL1X2  [FIDUCIAL-1X2]  41.91,93.47 0 top
JP74  FIDUCIAL1X2  [FIDUCIAL-1X2]  13.34,118.87 0 top
JP75  M111X11_NO_SILK  [1X11_NO_SILK]  15.24,113.67 0 top
JP76  M111X11_NO_SILK  [1X11_NO_SILK]  40.64,98.68 180 top
JP77  FIDUCIAL1X2  [FIDUCIAL-1X2]  81.28,93.47 0 top
JP78  FIDUCIAL1X2  [FIDUCIAL-1X2]  52.7,118.87 0 top
JP79  M111X11_NO_SILK  [1X11_NO_SILK]  54.61,113.67 0 top
JP80  M111X11_NO_SILK  [1X11_NO_SILK]  80.01,98.68 180 top
JP81  FIDUCIAL1X2  [FIDUCIAL-1X2]  120.65,93.47 0 top
JP82  FIDUCIAL1X2  [FIDUCIAL-1X2]  92.08,118.87 0 top
JP83  M111X11_NO_SILK  [1X11_NO_SILK]  93.98,113.67 0 top
JP84  M111X11_NO_SILK  [1X11_NO_SILK]  119.38,98.68 180 top
JP85  FIDUCIAL1X2  [FIDUCIAL-1X2]  160.02,93.47 0 top
JP86  FIDUCIAL1X2  [FIDUCIAL-1X2]  131.44,118.87 0 top
JP87  M111X11_NO_SILK  [1X11_NO_SILK]  133.35,113.67 0 top
JP88  M111X11_NO_SILK  [1X11_NO_SILK]  158.75,98.68 180 top
JP89  FIDUCIAL1X2  [FIDUCIAL-1X2]  199.39,93.47 0 top
JP90  FIDUCIAL1X2  [FIDUCIAL-1X2]  170.81,118.87 0 top
JP91  M111X11_NO_SILK  [1X11_NO_SILK]  172.72,113.67 0 top
JP92  M111X11_NO_SILK  [1X11_NO_SILK]  198.12,98.68 180 top
JP93  FIDUCIAL1X2  [FIDUCIAL-1X2]  238.76,93.47 0 top
JP94  FIDUCIAL1X2  [FIDUCIAL-1X2]  210.19,118.87 0 top
JP95  M111X11_NO_SILK  [1X11_NO_SILK]  212.09,113.67 0 top
JP96  M111X11_NO_SILK  [1X11_NO_SILK]  237.49,98.68 180 top
JP97  FIDUCIAL1X2  [FIDUCIAL-1X2]  41.91,121.92 0 top
JP98  FIDUCIAL1X2  [FIDUCIAL-1X2]  13.34,147.32 0 top
JP99  M111X11_NO_SILK  [1X11_NO_SILK]  15.24,142.11 0 top
JP100  M111X11_NO_SILK  [1X11_NO_SILK]  40.64,127.13 180 top
JP101  FIDUCIAL1X2  [FIDUCIAL-1X2]  81.28,121.92 0 top
JP102  FIDUCIAL1X2  [FIDUCIAL-1X2]  52.7,147.32 0 top
JP103  M111X11_NO_SILK  [1X11_NO_SILK]  54.61,142.11 0 top
JP104  M111X11_NO_SILK  [1X11_NO_SILK]  80.01,127.13 180 top
JP105  FIDUCIAL1X2  [FIDUCIAL-1X2]  120.65,121.92 0 top
JP106  FIDUCIAL1X2  [FIDUCIAL-1X2]  92.08,147.32 0 top
JP107  M111X11_NO_SILK  [1X11_NO_SILK]  93.98,142.11 0 top
JP108  M111X11_NO_SILK  [1X11_NO_SILK]  119.38,127.13 180 top
JP109  FIDUCIAL1X2  [FIDUCIAL-1X2]  160.02,121.92 0 top
JP110  FIDUCIAL1X2  [FIDUCIAL-1X2]  131.44,147.32 0 top
JP111  M111X11_NO_SILK  [1X11_NO_SILK]  133.35,142.11 0 top
JP112  M111X11_NO_SILK  [1X11_NO_SILK]  158.75,127.13 180 top
JP113  FIDUCIAL1X2  [FIDUCIAL-1X2]  199.39,121.92 0 top
JP114  FIDUCIAL1X2  [FIDUCIAL-1X2]  170.81,147.32 0 top
JP115  M111X11_NO_SILK  [1X11_NO_SILK]  172.72,142.11 0 top
JP116  M111X11_NO_SILK  [1X11_NO_SILK]  198.12,127.13 180 top
JP117  FIDUCIAL1X2  [FIDUCIAL-1X2]  238.76,121.92 0 top
JP118  FIDUCIAL1X2  [FIDUCIAL-1X2]  210.19,147.32 0 top
JP119  M111X11_NO_SILK  [1X11_NO_SILK]  212.09,142.11 0 top
JP120  M111X11_NO_SILK  [1X11_NO_SILK]  237.49,127.13 180 top
JP121  FIDUCIAL1X2  [FIDUCIAL-1X2]  41.91,150.37 0 top
JP122  FIDUCIAL1X2  [FIDUCIAL-1X2]  13.34,175.77 0 top
JP123  M111X11_NO_SILK  [1X11_NO_SILK]  15.24,170.56 0 top
JP124  M111X11_NO_SILK  [1X11_NO_SILK]  40.64,155.57 180 top
JP125  FIDUCIAL1X2  [FIDUCIAL-1X2]  81.28,150.37 0 top
JP126  FIDUCIAL1X2  [FIDUCIAL-1X2]  52.7,175.77 0 top
JP127  M111X11_NO_SILK  [1X11_NO_SILK]  54.61,170.56 0 top
JP128  M111X11_NO_SILK  [1X11_NO_SILK]  80.01,155.57 180 top
JP129  FIDUCIAL1X2  [FIDUCIAL-1X2]  120.65,150.37 0 top
JP130  FIDUCIAL1X2  [FIDUCIAL-1X2]  92.08,175.77 0 top
JP131  M111X11_NO_SILK  [1X11_NO_SILK]  93.98,170.56 0 top
JP132  M111X11_NO_SILK  [1X11_NO_SILK]  119.38,155.57 180 top
JP133  FIDUCIAL1X2  [FIDUCIAL-1X2]  160.02,150.37 0 top
JP134  FIDUCIAL1X2  [FIDUCIAL-1X2]  131.44,175.77 0 top
JP135  M111X11_NO_SILK  [1X11_NO_SILK]  133.35,170.56 0 top
JP136  M111X11_NO_SILK  [1X11_NO_SILK]  158.75,155.57 180 top
JP137  FIDUCIAL1X2  [FIDUCIAL-1X2]  199.39,150.37 0 top
JP138  FIDUCIAL1X2  [FIDUCIAL-1X2]  170.81,175.77 0 top
JP139  M111X11_NO_SILK  [1X11_NO_SILK]  172.72,170.56 0 top
JP140  M111X11_NO_SILK  [1X11_NO_SILK]  198.12,155.57 180 top
JP141  FIDUCIAL1X2  [FIDUCIAL-1X2]  238.76,150.37 0 top
JP142  FIDUCIAL1X2  [FIDUCIAL-1X2]  210.19,175.77 0 top
JP143  M111X11_NO_SILK  [1X11_NO_SILK]  212.09,170.56 0 top
JP144  M111X11_NO_SILK  [1X11_NO_SILK]  237.49,155.57 180 top
LOGO1  OSHW-LOGOS  [OSHW-LOGO-S]  15.75,32.77 90 top
LOGO2  OSHW-LOGOS  [OSHW-LOGO-S]  55.12,32.77 90 top
LOGO3  OSHW-LOGOS  [OSHW-LOGO-S]  94.49,32.77 90 top
LOGO4  OSHW-LOGOS  [OSHW-LOGO-S]  133.86,32.77 90 top
LOGO5  OSHW-LOGOS  [OSHW-LOGO-S]  173.23,32.77 90 top
LOGO6  OSHW-LOGOS  [OSHW-LOGO-S]  212.6,32.77 90 top
LOGO7  OSHW-LOGOS  [OSHW-LOGO-S]  15.75,61.21 90 top
LOGO8  OSHW-LOGOS  [OSHW-LOGO-S]  55.12,61.21 90 top
LOGO9  OSHW-LOGOS  [OSHW-LOGO-S]  94.49,61.21 90 top
LOGO10  OSHW-LOGOS  [OSHW-LOGO-S]  133.86,61.21 90 top
LOGO11  OSHW-LOGOS  [OSHW-LOGO-S]  173.23,61.21 90 top
LOGO12  OSHW-LOGOS  [OSHW-LOGO-S]  212.6,61.21 90 top
LOGO13  OSHW-LOGOS  [OSHW-LOGO-S]  15.75,89.66 90 top
LOGO14  OSHW-LOGOS  [OSHW-LOGO-S]  55.12,89.66 90 top
LOGO15  OSHW-LOGOS  [OSHW-LOGO-S]  94.49,89.66 90 top
LOGO16  OSHW-LOGOS  [OSHW-LOGO-S]  133.86,89.66 90 top
LOGO17  OSHW-LOGOS  [OSHW-LOGO-S]  173.23,89.66 90 top
LOGO18  OSHW-LOGOS  [OSHW-LOGO-S]  212.6,89.66 90 top
LOGO19  OSHW-LOGOS  [OSHW-LOGO-S]  15.75,118.11 90 top
LOGO20  OSHW-LOGOS  [OSHW-LOGO-S]  55.12,118.11 90 top
LOGO21  OSHW-LOGOS  [OSHW-LOGO-S]  94.49,118.11 90 top
LOGO22  OSHW-LOGOS  [OSHW-LOGO-S]  133.86,118.11 90 top
LOGO23  OSHW-LOGOS  [OSHW-LOGO-S]  173.23,118.11 90 top
LOGO24  OSHW-LOGOS  [OSHW-LOGO-S]  212.6,118.11 90 top
LOGO25  OSHW-LOGOS  [OSHW-LOGO-S]  15.75,146.56 90 top
LOGO26  OSHW-LOGOS  [OSHW-LOGO-S]  55.12,146.56 90 top
LOGO27  OSHW-LOGOS  [OSHW-LOGO-S]  94.49,146.56 90 top
LOGO28  OSHW-LOGOS  [OSHW-LOGO-S]  133.86,146.56 90 top
LOGO29  OSHW-LOGOS  [OSHW-LOGO-S]  173.23,146.56 90 top
LOGO30  OSHW-LOGOS  [OSHW-LOGO-S]  212.6,146.56 90 top
LOGO31  OSHW-LOGOS  [OSHW-LOGO-S]  15.75,175.01 90 top
LOGO32  OSHW-LOGOS  [OSHW-LOGO-S]  55.12,175.01 90 top
LOGO33  OSHW-LOGOS  [OSHW-LOGO-S]  94.49,175.01 90 top
LOGO34  OSHW-LOGOS  [OSHW-LOGO-S]  133.86,175.01 90 top
LOGO35  OSHW-LOGOS  [OSHW-LOGO-S]  173.23,175.01 90 top
LOGO36  OSHW-LOGOS  [OSHW-LOGO-S]  212.6,175.01 90 top
R1  27  [0603-RES]  60.96,21.08 0 top
R2  27  [0603-RES]  21.59,21.08 0 top
R3  27  [0603-RES]  60.96,19.3 0 top
R4  1k  [0603-RES]  36.83,17.27 0 top
R5  27  [0603-RES]  21.59,19.3 0 top
R6  1k  [0603-RES]  21.59,25.91 0 top
R7  330  [0603-RES]  26.67,25.91 180 top
R8  1k  [0603-RES]  36.83,15.49 0 top
R9  1k  [0603-RES]  60.96,25.91 0 top
R10  330  [0603-RES]  66.04,25.91 180 top
R11  1k  [0603-RES]  76.2,17.27 0 top
R12  1k  [0603-RES]  76.2,15.49 0 top
R13  27  [0603-RES]  100.33,21.08 0 top
R14  27  [0603-RES]  100.33,19.3 0 top
R15  1k  [0603-RES]  100.33,25.91 0 top
R16  330  [0603-RES]  105.41,25.91 180 top
R17  1k  [0603-RES]  115.57,17.27 0 top
R18  1k  [0603-RES]  115.57,15.49 0 top
R19  27  [0603-RES]  139.7,21.08 0 top
R20  27  [0603-RES]  139.7,19.3 0 top
R21  1k  [0603-RES]  139.7,25.91 0 top
R22  330  [0603-RES]  144.78,25.91 180 top
R23  1k  [0603-RES]  154.94,17.27 0 top
R24  1k  [0603-RES]  154.94,15.49 0 top
R25  27  [0603-RES]  179.07,21.08 0 top
R26  27  [0603-RES]  179.07,19.3 0 top
R27  1k  [0603-RES]  179.07,25.91 0 top
R28  330  [0603-RES]  184.15,25.91 180 top
R29  1k  [0603-RES]  194.31,17.27 0 top
R30  1k  [0603-RES]  194.31,15.49 0 top
R31  27  [0603-RES]  218.44,21.08 0 top
R32  27  [0603-RES]  218.44,19.3 0 top
R33  1k  [0603-RES]  218.44,25.91 0 top
R34  330  [0603-RES]  223.52,25.91 180 top
R35  1k  [0603-RES]  233.68,17.27 0 top
R36  1k  [0603-RES]  233.68,15.49 0 top
R37  27  [0603-RES]  21.59,49.53 0 top
R38  27  [0603-RES]  21.59,47.75 0 top
R39  1k  [0603-RES]  21.59,54.36 0 top
R40  330  [0603-RES]  26.67,54.36 180 top
R41  1k  [0603-RES]  36.83,45.72 0 top
R42  1k  [0603-RES]  36.83,43.94 0 top
R43  27  [0603-RES]  60.96,49.53 0 top
R44  27  [0603-RES]  60.96,47.75 0 top
R45  1k  [0603-RES]  60.96,54.36 0 top
R46  330  [0603-RES]  66.04,54.36 180 top
R47  1k  [0603-RES]  76.2,45.72 0 top
R48  1k  [0603-RES]  76.2,43.94 0 top
R49  27  [0603-RES]  100.33,49.53 0 top
R50  27  [0603-RES]  100.33,47.75 0 top
R51  1k  [0603-RES]  100.33,54.36 0 top
R52  330  [0603-RES]  105.41,54.36 180 top
R53  1k  [0603-RES]  115.57,45.72 0 top
R54  1k  [0603-RES]  115.57,43.94 0 top
R55  27  [0603-RES]  139.7,49.53 0 top
R56  27  [0603-RES]  139.7,47.75 0 top
R57  1k  [0603-RES]  139.7,54.36 0 top
R58  330  [0603-RES]  144.78,54.36 180 top
R59  1k  [0603-RES]  154.94,45.72 0 top
R60  1k  [0603-RES]  154.94,43.94 0 top
R61  27  [0603-RES]  179.07,49.53 0 top
R62  27  [0603-RES]  179.07,47.75 0 top
R63  1k  [0603-RES]  179.07,54.36 0 top
R64  330  [0603-RES]  184.15,54.36 180 top
R65  1k  [0603-RES]  194.31,45.72 0 top
R66  1k  [0603-RES]  194.31,43.94 0 top
R67  27  [0603-RES]  218.44,49.53 0 top
R68  27  [0603-RES]  218.44,47.75 0 top
R69  1k  [0603-RES]  218.44,54.36 0 top
R70  330  [0603-RES]  223.52,54.36 180 top
R71  1k  [0603-RES]  233.68,45.72 0 top
R72  1k  [0603-RES]  233.68,43.94 0 top
R73  27  [0603-RES]  21.59,77.98 0 top
R74  27  [0603-RES]  21.59,76.2 0 top
R75  1k  [0603-RES]  21.59,82.8 0 top
R76  330  [0603-RES]  26.67,82.8 180 top
R77  1k  [0603-RES]  36.83,74.17 0 top
R78  1k  [0603-RES]  36.83,72.39 0 top
R79  27  [0603-RES]  60.96,77.98 0 top
R80  27  [0603-RES]  60.96,76.2 0 top
R81  1k  [0603-RES]  60.96,82.8 0 top
R82  330  [0603-RES]  66.04,82.8 180 top
R83  1k  [0603-RES]  76.2,74.17 0 top
R84  1k  [0603-RES]  76.2,72.39 0 top
R85  27  [0603-RES]  100.33,77.98 0 top
R86  27  [0603-RES]  100.33,76.2 0 top
R87  1k  [0603-RES]  100.33,82.8 0 top
R88  330  [0603-RES]  105.41,82.8 180 top
R89  1k  [0603-RES]  115.57,74.17 0 top
R90  1k  [0603-RES]  115.57,72.39 0 top
R91  27  [0603-RES]  139.7,77.98 0 top
R92  27  [0603-RES]  139.7,76.2 0 top
R93  1k  [0603-RES]  139.7,82.8 0 top
R94  330  [0603-RES]  144.78,82.8 180 top
R95  1k  [0603-RES]  154.94,74.17 0 top
R96  1k  [0603-RES]  154.94,72.39 0 top
R97  27  [0603-RES]  179.07,77.98 0 top
R98  27  [0603-RES]  179.07,76.2 0 top
R99  1k  [0603-RES]  179.07,82.8 0 top
R100  330  [0603-RES]  184.15,82.8 180 top
R101  1k  [0603-RES]  194.31,74.17 0 top
R102  1k  [0603-RES]  194.31,72.39 0 top
R103  27  [0603-RES]  218.44,77.98 0 top
R104  27  [0603-RES]  218.44,76.2 0 top
R105  1k  [0603-RES]  218.44,82.8 0 top
R106  330  [0603-RES]  223.52,82.8 180 top
R107  1k  [0603-RES]  233.68,74.17 0 top
R108  1k  [0603-RES]  233.68,72.39 0 top
R109  27  [0603-RES]  21.59,106.43 0 top
R110  27  [0603-RES]  21.59,104.65 0 top
R111  1k  [0603-RES]  21.59,111.25 0 top
R112  330  [0603-RES]  26.67,111.25 180 top
R113  1k  [0603-RES]  36.83,102.62 0 top
R114  1k  [0603-RES]  36.83,100.84 0 top
R115  27  [0603-RES]  60.96,106.43 0 top
R116  27  [0603-RES]  60.96,104.65 0 top
R117  1k  [0603-RES]  60.96,111.25 0 top
R118  330  [0603-RES]  66.04,111.25 180 top
R119  1k  [0603-RES]  76.2,102.62 0 top
R120  1k  [0603-RES]  76.2,100.84 0 top
R121  27  [0603-RES]  100.33,106.43 0 top
R122  27  [0603-RES]  100.33,104.65 0 top
R123  1k  [0603-RES]  100.33,111.25 0 top
R124  330  [0603-RES]  105.41,111.25 180 top
R125  1k  [0603-RES]  115.57,102.62 0 top
R126  1k  [0603-RES]  115.57,100.84 0 top
R127  27  [0603-RES]  139.7,106.43 0 top
R128  27  [0603-RES]  139.7,104.65 0 top
R129  1k  [0603-RES]  139.7,111.25 0 top
R130  330  [0603-RES]  144.78,111.25 180 top
R131  1k  [0603-RES]  154.94,102.62 0 top
R132  1k  [0603-RES]  154.94,100.84 0 top
R133  27  [0603-RES]  179.07,106.43 0 top
R134  27  [0603-RES]  179.07,104.65 0 top
R135  1k  [0603-RES]  179.07,111.25 0 top
R136  330  [0603-RES]  184.15,111.25 180 top
R137  1k  [0603-RES]  194.31,102.62 0 top
R138  1k  [0603-RES]  194.31,100.84 0 top
R139  27  [0603-RES]  218.44,106.43 0 top
R140  27  [0603-RES]  218.44,104.65 0 top
R141  1k  [0603-RES]  218.44,111.25 0 top
R142  330  [0603-RES]  223.52,111.25 180 top
R143  1k  [0603-RES]  233.68,102.62 0 top
R144  1k  [0603-RES]  233.68,100.84 0 top
R145  27  [0603-RES]  21.59,134.87 0 top
R146  27  [0603-RES]  21.59,133.1 0 top
R147  1k  [0603-RES]  21.59,139.7 0 top
R148  330  [0603-RES]  26.67,139.7 180 top
R149  1k  [0603-RES]  36.83,131.06 0 top
R150  1k  [0603-RES]  36.83,129.29 0 top
R151  27  [0603-RES]  60.96,134.87 0 top
R152  27  [0603-RES]  60.96,133.1 0 top
R153  1k  [0603-RES]  60.96,139.7 0 top
R154  330  [0603-RES]  66.04,139.7 180 top
R155  1k  [0603-RES]  76.2,131.06 0 top
R156  1k  [0603-RES]  76.2,129.29 0 top
R157  27  [0603-RES]  100.33,134.87 0 top
R158  27  [0603-RES]  100.33,133.1 0 top
R159  1k  [0603-RES]  100.33,139.7 0 top
R160  330  [0603-RES]  105.41,139.7 180 top
R161  1k  [0603-RES]  115.57,131.06 0 top
R162  1k  [0603-RES]  115.57,129.29 0 top
R163  27  [0603-RES]  139.7,134.87 0 top
R164  27  [0603-RES]  139.7,133.1 0 top
R165  1k  [0603-RES]  139.7,139.7 0 top
R166  330  [0603-RES]  144.78,139.7 180 top
R167  1k  [0603-RES]  154.94,131.06 0 top
R168  1k  [0603-RES]  154.94,129.29 0 top
R169  27  [0603-RES]  179.07,134.87 0 top
R170  27  [0603-RES]  179.07,133.1 0 top
R171  1k  [0603-RES]  179.07,139.7 0 top
R172  330  [0603-RES]  184.15,139.7 180 top
R173  1k  [0603-RES]  194.31,131.06 0 top
R174  1k  [0603-RES]  194.31,129.29 0 top
R175  27  [0603-RES]  218.44,134.87 0 top
R176  27  [0603-RES]  218.44,133.1 0 top
R177  1k  [0603-RES]  218.44,139.7 0 top
R178  330  [0603-RES]  223.52,139.7 180 top
R179  1k  [0603-RES]  233.68,131.06 0 top
R180  1k  [0603-RES]  233.68,129.29 0 top
R181  27  [0603-RES]  21.59,163.32 0 top
R182  27  [0603-RES]  21.59,161.54 0 top
R183  1k  [0603-RES]  21.59,168.15 0 top
R184  330  [0603-RES]  26.67,168.15 180 top
R185  1k  [0603-RES]  36.83,159.51 0 top
R186  1k  [0603-RES]  36.83,157.73 0 top
R187  27  [0603-RES]  60.96,163.32 0 top
R188  27  [0603-RES]  60.96,161.54 0 top
R189  1k  [0603-RES]  60.96,168.15 0 top
R190  330  [0603-RES]  66.04,168.15 180 top
R191  1k  [0603-RES]  76.2,159.51 0 top
R192  1k  [0603-RES]  76.2,157.73 0 top
R193  27  [0603-RES]  100.33,163.32 0 top
R194  27  [0603-RES]  100.33,161.54 0 top
R195  1k  [0603-RES]  100.33,168.15 0 top
R196  330  [0603-RES]  105.41,168.15 180 top
R197  1k  [0603-RES]  115.57,159.51 0 top
R198  1k  [0603-RES]  115.57,157.73 0 top
R199  27  [0603-RES]  139.7,163.32 0 top
R200  27  [0603-RES]  139.7,161.54 0 top
R201  1k  [0603-RES]  139.7,168.15 0 top
R202  330  [0603-RES]  144.78,168.15 180 top
R203  1k  [0603-RES]  154.94,159.51 0 top
R204  1k  [0603-RES]  154.94,157.73 0 top
R205  27  [0603-RES]  179.07,163.32 0 top
R206  27  [0603-RES]  179.07,161.54 0 top
R207  1k  [0603-RES]  179.07,168.15 0 top
R208  330  [0603-RES]  184.15,168.15 180 top
R209  1k  [0603-RES]  194.31,159.51 0 top
R210  1k  [0603-RES]  194.31,157.73 0 top
R211  27  [0603-RES]  218.44,163.32 0 top
R212  27  [0603-RES]  218.44,161.54 0 top
R213  1k  [0603-RES]  218.44,168.15 0 top
R214  330  [0603-RES]  223.52,168.15 180 top
R215  1k  [0603-RES]  233.68,159.51 0 top
R216  1k  [0603-RES]  233.68,157.73 0 top
S1  Reset  [TACTILE_SWITCH_SMD]  82.42,20.83 270 top
S2  Reset  [TACTILE_SWITCH_SMD]  43.05,20.83 270 top
S3  Reset  [TACTILE_SWITCH_SMD]  121.79,20.83 270 top
S4  Reset  [TACTILE_SWITCH_SMD]  161.16,20.83 270 top
S5  Reset  [TACTILE_SWITCH_SMD]  200.53,20.83 270 top
S6  Reset  [TACTILE_SWITCH_SMD]  239.9,20.83 270 top
S7  Reset  [TACTILE_SWITCH_SMD]  43.05,49.28 270 top
S8  Reset  [TACTILE_SWITCH_SMD]  82.42,49.28 270 top
S9  Reset  [TACTILE_SWITCH_SMD]  121.79,49.28 270 top
S10  Reset  [TACTILE_SWITCH_SMD]  161.16,49.28 270 top
S11  Reset  [TACTILE_SWITCH_SMD]  200.53,49.28 270 top
S12  Reset  [TACTILE_SWITCH_SMD]  239.9,49.28 270 top
S13  Reset  [TACTILE_SWITCH_SMD]  43.05,77.72 270 top
S14  Reset  [TACTILE_SWITCH_SMD]  82.42,77.72 270 top
S15  Reset  [TACTILE_SWITCH_SMD]  121.79,77.72 270 top
S16  Reset  [TACTILE_SWITCH_SMD]  161.16,77.72 270 top
S17  Reset  [TACTILE_SWITCH_SMD]  200.53,77.72 270 top
S18  Reset  [TACTILE_SWITCH_SMD]  239.9,77.72 270 top
S19  Reset  [TACTILE_SWITCH_SMD]  43.05,106.17 270 top
S20  Reset  [TACTILE_SWITCH_SMD]  82.42,106.17 270 top
S21  Reset  [TACTILE_SWITCH_SMD]  121.79,106.17 270 top
S22  Reset  [TACTILE_SWITCH_SMD]  161.16,106.17 270 top
S23  Reset  [TACTILE_SWITCH_SMD]  200.53,106.17 270 top
S24  Reset  [TACTILE_SWITCH_SMD]  239.9,106.17 270 top
S25  Reset  [TACTILE_SWITCH_SMD]  43.05,134.62 270 top
S26  Reset  [TACTILE_SWITCH_SMD]  82.42,134.62 270 top
S27  Reset  [TACTILE_SWITCH_SMD]  121.79,134.62 270 top
S28  Reset  [TACTILE_SWITCH_SMD]  161.16,134.62 270 top
S29  Reset  [TACTILE_SWITCH_SMD]  200.53,134.62 270 top
S30  Reset  [TACTILE_SWITCH_SMD]  239.9,134.62 270 top
S31  Reset  [TACTILE_SWITCH_SMD]  43.05,163.07 270 top
S32  Reset  [TACTILE_SWITCH_SMD]  82.42,163.07 270 top
S33  Reset  [TACTILE_SWITCH_SMD]  121.79,163.07 270 top
S34  Reset  [TACTILE_SWITCH_SMD]  161.16,163.07 270 top
S35  Reset  [TACTILE_SWITCH_SMD]  200.53,163.07 270 top
S36  Reset  [TACTILE_SWITCH_SMD]  239.9,163.07 270 top
SJ1  RSSI_LED_EN  [SJ_2S-TRACE]  25.4,30.99 180 bottom
SJ2  CTS_EN  [SJ_2S-TRACE]  29.21,10.67 180 bottom
SJ3  RTS_EN  [SJ_2S-TRACE]  21.59,10.67 0 bottom
SJ4  DTR  [SJ_2S-TRACE]  19.05,30.99 0 bottom
SJ5  RSSI_LED_EN  [SJ_2S-TRACE]  64.77,30.99 180 bottom
SJ6  DTR  [SJ_2S-TRACE]  58.42,30.99 0 bottom
SJ7  RTS_EN  [SJ_2S-TRACE]  60.96,10.67 0 bottom
SJ8  CTS_EN  [SJ_2S-TRACE]  68.58,10.67 180 bottom
SJ9  RSSI_LED_EN  [SJ_2S-TRACE]  104.14,30.99 180 bottom
SJ10  DTR  [SJ_2S-TRACE]  97.79,30.99 0 bottom
SJ11  RTS_EN  [SJ_2S-TRACE]  100.33,10.67 0 bottom
SJ12  CTS_EN  [SJ_2S-TRACE]  107.95,10.67 180 bottom
SJ13  RSSI_LED_EN  [SJ_2S-TRACE]  143.51,30.99 180 bottom
SJ14  DTR  [SJ_2S-TRACE]  137.16,30.99 0 bottom
SJ15  RTS_EN  [SJ_2S-TRACE]  139.7,10.67 0 bottom
SJ16  CTS_EN  [SJ_2S-TRACE]  147.32,10.67 180 bottom
SJ17  RSSI_LED_EN  [SJ_2S-TRACE]  182.88,30.99 180 bottom
SJ18  DTR  [SJ_2S-TRACE]  176.53,30.99 0 bottom
SJ19  RTS_EN  [SJ_2S-TRACE]  179.07,10.67 0 bottom
SJ20  CTS_EN  [SJ_2S-TRACE]  186.69,10.67 180 bottom
SJ21  RSSI_LED_EN  [SJ_2S-TRACE]  222.25,30.99 180 bottom
SJ22  DTR  [SJ_2S-TRACE]  215.9,30.99 0 bottom
SJ23  RTS_EN  [SJ_2S-TRACE]  218.44,10.67 0 bottom
SJ24  CTS_EN  [SJ_2S-TRACE]  226.06,10.67 180 bottom
SJ25  RSSI_LED_EN  [SJ_2S-TRACE]  25.4,59.44 180 bottom
SJ26  DTR  [SJ_2S-TRACE]  19.05,59.44 0 bottom
SJ27  RTS_EN  [SJ_2S-TRACE]  21.59,39.12 0 bottom
SJ28  CTS_EN  [SJ_2S-TRACE]  29.21,39.12 180 bottom
SJ29  RSSI_LED_EN  [SJ_2S-TRACE]  64.77,59.44 180 bottom
SJ30  DTR  [SJ_2S-TRACE]  58.42,59.44 0 bottom
SJ31  RTS_EN  [SJ_2S-TRACE]  60.96,39.12 0 bottom
SJ32  CTS_EN  [SJ_2S-TRACE]  68.58,39.12 180 bottom
SJ33  RSSI_LED_EN  [SJ_2S-TRACE]  104.14,59.44 180 bottom
SJ34  DTR  [SJ_2S-TRACE]  97.79,59.44 0 bottom
SJ35  RTS_EN  [SJ_2S-TRACE]  100.33,39.12 0 bottom
SJ36  CTS_EN  [SJ_2S-TRACE]  107.95,39.12 180 bottom
SJ37  RSSI_LED_EN  [SJ_2S-TRACE]  143.51,59.44 180 bottom
SJ38  DTR  [SJ_2S-TRACE]  137.16,59.44 0 bottom
SJ39  RTS_EN  [SJ_2S-TRACE]  139.7,39.12 0 bottom
SJ40  CTS_EN  [SJ_2S-TRACE]  147.32,39.12 180 bottom
SJ41  RSSI_LED_EN  [SJ_2S-TRACE]  182.88,59.44 180 bottom
SJ42  DTR  [SJ_2S-TRACE]  176.53,59.44 0 bottom
SJ43  RTS_EN  [SJ_2S-TRACE]  179.07,39.12 0 bottom
SJ44  CTS_EN  [SJ_2S-TRACE]  186.69,39.12 180 bottom
SJ45  RSSI_LED_EN  [SJ_2S-TRACE]  222.25,59.44 180 bottom
SJ46  DTR  [SJ_2S-TRACE]  215.9,59.44 0 bottom
SJ47  RTS_EN  [SJ_2S-TRACE]  218.44,39.12 0 bottom
SJ48  CTS_EN  [SJ_2S-TRACE]  226.06,39.12 180 bottom
SJ49  RSSI_LED_EN  [SJ_2S-TRACE]  25.4,87.88 180 bottom
SJ50  DTR  [SJ_2S-TRACE]  19.05,87.88 0 bottom
SJ51  RTS_EN  [SJ_2S-TRACE]  21.59,67.56 0 bottom
SJ52  CTS_EN  [SJ_2S-TRACE]  29.21,67.56 180 bottom
SJ53  RSSI_LED_EN  [SJ_2S-TRACE]  64.77,87.88 180 bottom
SJ54  DTR  [SJ_2S-TRACE]  58.42,87.88 0 bottom
SJ55  RTS_EN  [SJ_2S-TRACE]  60.96,67.56 0 bottom
SJ56  CTS_EN  [SJ_2S-TRACE]  68.58,67.56 180 bottom
SJ57  RSSI_LED_EN  [SJ_2S-TRACE]  104.14,87.88 180 bottom
SJ58  DTR  [SJ_2S-TRACE]  97.79,87.88 0 bottom
SJ59  RTS_EN  [SJ_2S-TRACE]  100.33,67.56 0 bottom
SJ60  CTS_EN  [SJ_2S-TRACE]  107.95,67.56 180 bottom
SJ61  RSSI_LED_EN  [SJ_2S-TRACE]  143.51,87.88 180 bottom
SJ62  DTR  [SJ_2S-TRACE]  137.16,87.88 0 bottom
SJ63  RTS_EN  [SJ_2S-TRACE]  139.7,67.56 0 bottom
SJ64  CTS_EN  [SJ_2S-TRACE]  147.32,67.56 180 bottom
SJ65  RSSI_LED_EN  [SJ_2S-TRACE]  182.88,87.88 180 bottom
SJ66  DTR  [SJ_2S-TRACE]  176.53,87.88 0 bottom
SJ67  RTS_EN  [SJ_2S-TRACE]  179.07,67.56 0 bottom
SJ68  CTS_EN  [SJ_2S-TRACE]  186.69,67.56 180 bottom
SJ69  RSSI_LED_EN  [SJ_2S-TRACE]  222.25,87.88 180 bottom
SJ70  DTR  [SJ_2S-TRACE]  215.9,87.88 0 bottom
SJ71  RTS_EN  [SJ_2S-TRACE]  218.44,67.56 0 bottom
SJ72  CTS_EN  [SJ_2S-TRACE]  226.06,67.56 180 bottom
SJ73  RSSI_LED_EN  [SJ_2S-TRACE]  25.4,116.33 180 bottom
SJ74  DTR  [SJ_2S-TRACE]  19.05,116.33 0 bottom
SJ75  RTS_EN  [SJ_2S-TRACE]  21.59,96.01 0 bottom
SJ76  CTS_EN  [SJ_2S-TRACE]  29.21,96.01 180 bottom
SJ77  RSSI_LED_EN  [SJ_2S-TRACE]  64.77,116.33 180 bottom
SJ78  DTR  [SJ_2S-TRACE]  58.42,116.33 0 bottom
SJ79  RTS_EN  [SJ_2S-TRACE]  60.96,96.01 0 bottom
SJ80  CTS_EN  [SJ_2S-TRACE]  68.58,96.01 180 bottom
SJ81  RSSI_LED_EN  [SJ_2S-TRACE]  104.14,116.33 180 bottom
SJ82  DTR  [SJ_2S-TRACE]  97.79,116.33 0 bottom
SJ83  RTS_EN  [SJ_2S-TRACE]  100.33,96.01 0 bottom
SJ84  CTS_EN  [SJ_2S-TRACE]  107.95,96.01 180 bottom
SJ85  RSSI_LED_EN  [SJ_2S-TRACE]  143.51,116.33 180 bottom
SJ86  DTR  [SJ_2S-TRACE]  137.16,116.33 0 bottom
SJ87  RTS_EN  [SJ_2S-TRACE]  139.7,96.01 0 bottom
SJ88  CTS_EN  [SJ_2S-TRACE]  147.32,96.01 180 bottom
SJ89  RSSI_LED_EN  [SJ_2S-TRACE]  182.88,116.33 180 bottom
SJ90  DTR  [SJ_2S-TRACE]  176.53,116.33 0 bottom
SJ91  RTS_EN  [SJ_2S-TRACE]  179.07,96.01 0 bottom
SJ92  CTS_EN  [SJ_2S-TRACE]  186.69,96.01 180 bottom
SJ93  RSSI_LED_EN  [SJ_2S-TRACE]  222.25,116.33 180 bottom
SJ94  DTR  [SJ_2S-TRACE]  215.9,116.33 0 bottom
SJ95  RTS_EN  [SJ_2S-TRACE]  218.44,96.01 0 bottom
SJ96  CTS_EN  [SJ_2S-TRACE]  226.06,96.01 180 bottom
SJ97  RSSI_LED_EN  [SJ_2S-TRACE]  25.4,144.78 180 bottom
SJ98  DTR  [SJ_2S-TRACE]  19.05,144.78 0 bottom
SJ99  RTS_EN  [SJ_2S-TRACE]  21.59,124.46 0 bottom
SJ100  CTS_EN  [SJ_2S-TRACE]  29.21,124.46 180 bottom
SJ101  RSSI_LED_EN  [SJ_2S-TRACE]  64.77,144.78 180 bottom
SJ102  DTR  [SJ_2S-TRACE]  58.42,144.78 0 bottom
SJ103  RTS_EN  [SJ_2S-TRACE]  60.96,124.46 0 bottom
SJ104  CTS_EN  [SJ_2S-TRACE]  68.58,124.46 180 bottom
SJ105  RSSI_LED_EN  [SJ_2S-TRACE]  104.14,144.78 180 bottom
SJ106  DTR  [SJ_2S-TRACE]  97.79,144.78 0 bottom
SJ107  RTS_EN  [SJ_2S-TRACE]  100.33,124.46 0 bottom
SJ108  CTS_EN  [SJ_2S-TRACE]  107.95,124.46 180 bottom
SJ109  RSSI_LED_EN  [SJ_2S-TRACE]  143.51,144.78 180 bottom
SJ110  DTR  [SJ_2S-TRACE]  137.16,144.78 0 bottom
SJ111  RTS_EN  [SJ_2S-TRACE]  139.7,124.46 0 bottom
SJ112  CTS_EN  [SJ_2S-TRACE]  147.32,124.46 180 bottom
SJ113  RSSI_LED_EN  [SJ_2S-TRACE]  182.88,144.78 180 bottom
SJ114  DTR  [SJ_2S-TRACE]  176.53,144.78 0 bottom
SJ115  RTS_EN  [SJ_2S-TRACE]  179.07,124.46 0 bottom
SJ116  CTS_EN  [SJ_2S-TRACE]  186.69,124.46 180 bottom
SJ117  RSSI_LED_EN  [SJ_2S-TRACE]  222.25,144.78 180 bottom
SJ118  DTR  [SJ_2S-TRACE]  215.9,144.78 0 bottom
SJ119  RTS_EN  [SJ_2S-TRACE]  218.44,124.46 0 bottom
SJ120  CTS_EN  [SJ_2S-TRACE]  226.06,124.46 180 bottom
SJ121  RSSI_LED_EN  [SJ_2S-TRACE]  25.4,173.23 180 bottom
SJ122  DTR  [SJ_2S-TRACE]  19.05,173.23 0 bottom
SJ123  RTS_EN  [SJ_2S-TRACE]  21.59,152.91 0 bottom
SJ124  CTS_EN  [SJ_2S-TRACE]  29.21,152.91 180 bottom
SJ125  RSSI_LED_EN  [SJ_2S-TRACE]  64.77,173.23 180 bottom
SJ126  DTR  [SJ_2S-TRACE]  58.42,173.23 0 bottom
SJ127  RTS_EN  [SJ_2S-TRACE]  60.96,152.91 0 bottom
SJ128  CTS_EN  [SJ_2S-TRACE]  68.58,152.91 180 bottom
SJ129  RSSI_LED_EN  [SJ_2S-TRACE]  104.14,173.23 180 bottom
SJ130  DTR  [SJ_2S-TRACE]  97.79,173.23 0 bottom
SJ131  RTS_EN  [SJ_2S-TRACE]  100.33,152.91 0 bottom
SJ132  CTS_EN  [SJ_2S-TRACE]  107.95,152.91 180 bottom
SJ133  RSSI_LED_EN  [SJ_2S-TRACE]  143.51,173.23 180 bottom
SJ134  DTR  [SJ_2S-TRACE]  137.16,173.23 0 bottom
SJ135  RTS_EN  [SJ_2S-TRACE]  139.7,152.91 0 bottom
SJ136  CTS_EN  [SJ_2S-TRACE]  147.32,152.91 180 bottom
SJ137  RSSI_LED_EN  [SJ_2S-TRACE]  182.88,173.23 180 bottom
SJ138  DTR  [SJ_2S-TRACE]  176.53,173.23 0 bottom
SJ139  RTS_EN  [SJ_2S-TRACE]  179.07,152.91 0 bottom
SJ140  CTS_EN  [SJ_2S-TRACE]  186.69,152.91 180 bottom
SJ141  RSSI_LED_EN  [SJ_2S-TRACE]  222.25,173.23 180 bottom
SJ142  DTR  [SJ_2S-TRACE]  215.9,173.23 0 bottom
SJ143  RTS_EN  [SJ_2S-TRACE]  218.44,152.91 0 bottom
SJ144  CTS_EN  [SJ_2S-TRACE]  226.06,152.91 180 bottom
U1  XBEE-1B3  [XBEE-SMD]  55.88,20.83 270 top
U2  XBEE-1B3  [XBEE-SMD]  16.51,20.83 270 top
U3  MIC5205 3.3V  [SOT23-5]  36.83,24.64 270 top
U4  FT231XS  [SSOP20_L]  29.21,20.83 180 top
U5  MIC5205 3.3V  [SOT23-5]  76.2,24.64 270 top
U6  FT231XS  [SSOP20_L]  68.58,20.83 180 top
U7  XBEE-1B3  [XBEE-SMD]  95.25,20.83 270 top
U8  MIC5205 3.3V  [SOT23-5]  115.57,24.64 270 top
U9  FT231XS  [SSOP20_L]  107.95,20.83 180 top
U10  XBEE-1B3  [XBEE-SMD]  134.62,20.83 270 top
U11  MIC5205 3.3V  [SOT23-5]  154.94,24.64 270 top
U12  FT231XS  [SSOP20_L]  147.32,20.83 180 top
U13  XBEE-1B3  [XBEE-SMD]  173.99,20.83 270 top
U14  MIC5205 3.3V  [SOT23-5]  194.31,24.64 270 top
U15  FT231XS  [SSOP20_L]  186.69,20.83 180 top
U16  XBEE-1B3  [XBEE-SMD]  213.36,20.83 270 top
U17  MIC5205 3.3V  [SOT23-5]  233.68,24.64 270 top
U18  FT231XS  [SSOP20_L]  226.06,20.83 180 top
U19  XBEE-1B3  [XBEE-SMD]  16.51,49.28 270 top
U20  MIC5205 3.3V  [SOT23-5]  36.83,53.09 270 top
U21  FT231XS  [SSOP20_L]  29.21,49.28 180 top
U22  XBEE-1B3  [XBEE-SMD]  55.88,49.28 270 top
U23  MIC5205 3.3V  [SOT23-5]  76.2,53.09 270 top
U24  FT231XS  [SSOP20_L]  68.58,49.28 180 top
U25  XBEE-1B3  [XBEE-SMD]  95.25,49.28 270 top
U26  MIC5205 3.3V  [SOT23-5]  115.57,53.09 270 top
U27  FT231XS  [SSOP20_L]  107.95,49.28 180 top
U28  XBEE-1B3  [XBEE-SMD]  134.62,49.28 270 top
U29  MIC5205 3.3V  [SOT23-5]  154.94,53.09 270 top
U30  FT231XS  [SSOP20_L]  147.32,49.28 180 top
U31  XBEE-1B3  [XBEE-SMD]  173.99,49.28 270 top
U32  MIC5205 3.3V  [SOT23-5]  194.31,53.09 270 top
U33  FT231XS  [SSOP20_L]  186.69,49.28 180 top
U34  XBEE-1B3  [XBEE-SMD]  213.36,49.28 270 top
U35  MIC5205 3.3V  [SOT23-5]  233.68,53.09 270 top
U36  FT231XS  [SSOP20_L]  226.06,49.28 180 top
U37  XBEE-1B3  [XBEE-SMD]  16.51,77.72 270 top
U38  MIC5205 3.3V  [SOT23-5]  36.83,81.53 270 top
U39  FT231XS  [SSOP20_L]  29.21,77.72 180 top
U40  XBEE-1B3  [XBEE-SMD]  55.88,77.72 270 top
U41  MIC5205 3.3V  [SOT23-5]  76.2,81.53 270 top
U42  FT231XS  [SSOP20_L]  68.58,77.72 180 top
U43  XBEE-1B3  [XBEE-SMD]  95.25,77.72 270 top
U44  MIC5205 3.3V  [SOT23-5]  115.57,81.53 270 top
U45  FT231XS  [SSOP20_L]  107.95,77.72 180 top
U46  XBEE-1B3  [XBEE-SMD]  134.62,77.72 270 top
U47  MIC5205 3.3V  [SOT23-5]  154.94,81.53 270 top
U48  FT231XS  [SSOP20_L]  147.32,77.72 180 top
U49  XBEE-1B3  [XBEE-SMD]  173.99,77.72 270 top
U50  MIC5205 3.3V  [SOT23-5]  194.31,81.53 270 top
U51  FT231XS  [SSOP20_L]  186.69,77.72 180 top
U52  XBEE-1B3  [XBEE-SMD]  213.36,77.72 270 top
U53  MIC5205 3.3V  [SOT23-5]  233.68,81.53 270 top
U54  FT231XS  [SSOP20_L]  226.06,77.72 180 top
U55  XBEE-1B3  [XBEE-SMD]  16.51,106.17 270 top
U56  MIC5205 3.3V  [SOT23-5]  36.83,109.98 270 top
U57  FT231XS  [SSOP20_L]  29.21,106.17 180 top
U58  XBEE-1B3  [XBEE-SMD]  55.88,106.17 270 top
U59  MIC5205 3.3V  [SOT23-5]  76.2,109.98 270 top
U60  FT231XS  [SSOP20_L]  68.58,106.17 180 top
U61  XBEE-1B3  [XBEE-SMD]  95.25,106.17 270 top
U62  MIC5205 3.3V  [SOT23-5]  115.57,109.98 270 top
U63  FT231XS  [SSOP20_L]  107.95,106.17 180 top
U64  XBEE-1B3  [XBEE-SMD]  134.62,106.17 270 top